# Altium PCB Rackmount_DSP.PcbDoc (part 1 of 24)
Units mil, origin at the board's own origin, x right, y up, seen from the top; angles counter-clockwise.
Board outline 10629.92 x 8267.72 mil, 4 copper layers (Top Layer, Mid Layer 1, Mid Layer 2, Bottom Layer), stack 36.2 mil thick; 4500 components, 1565 nets, 9765 pads, 3289 vias.
Unrouted connection lines stored in the file: 1.
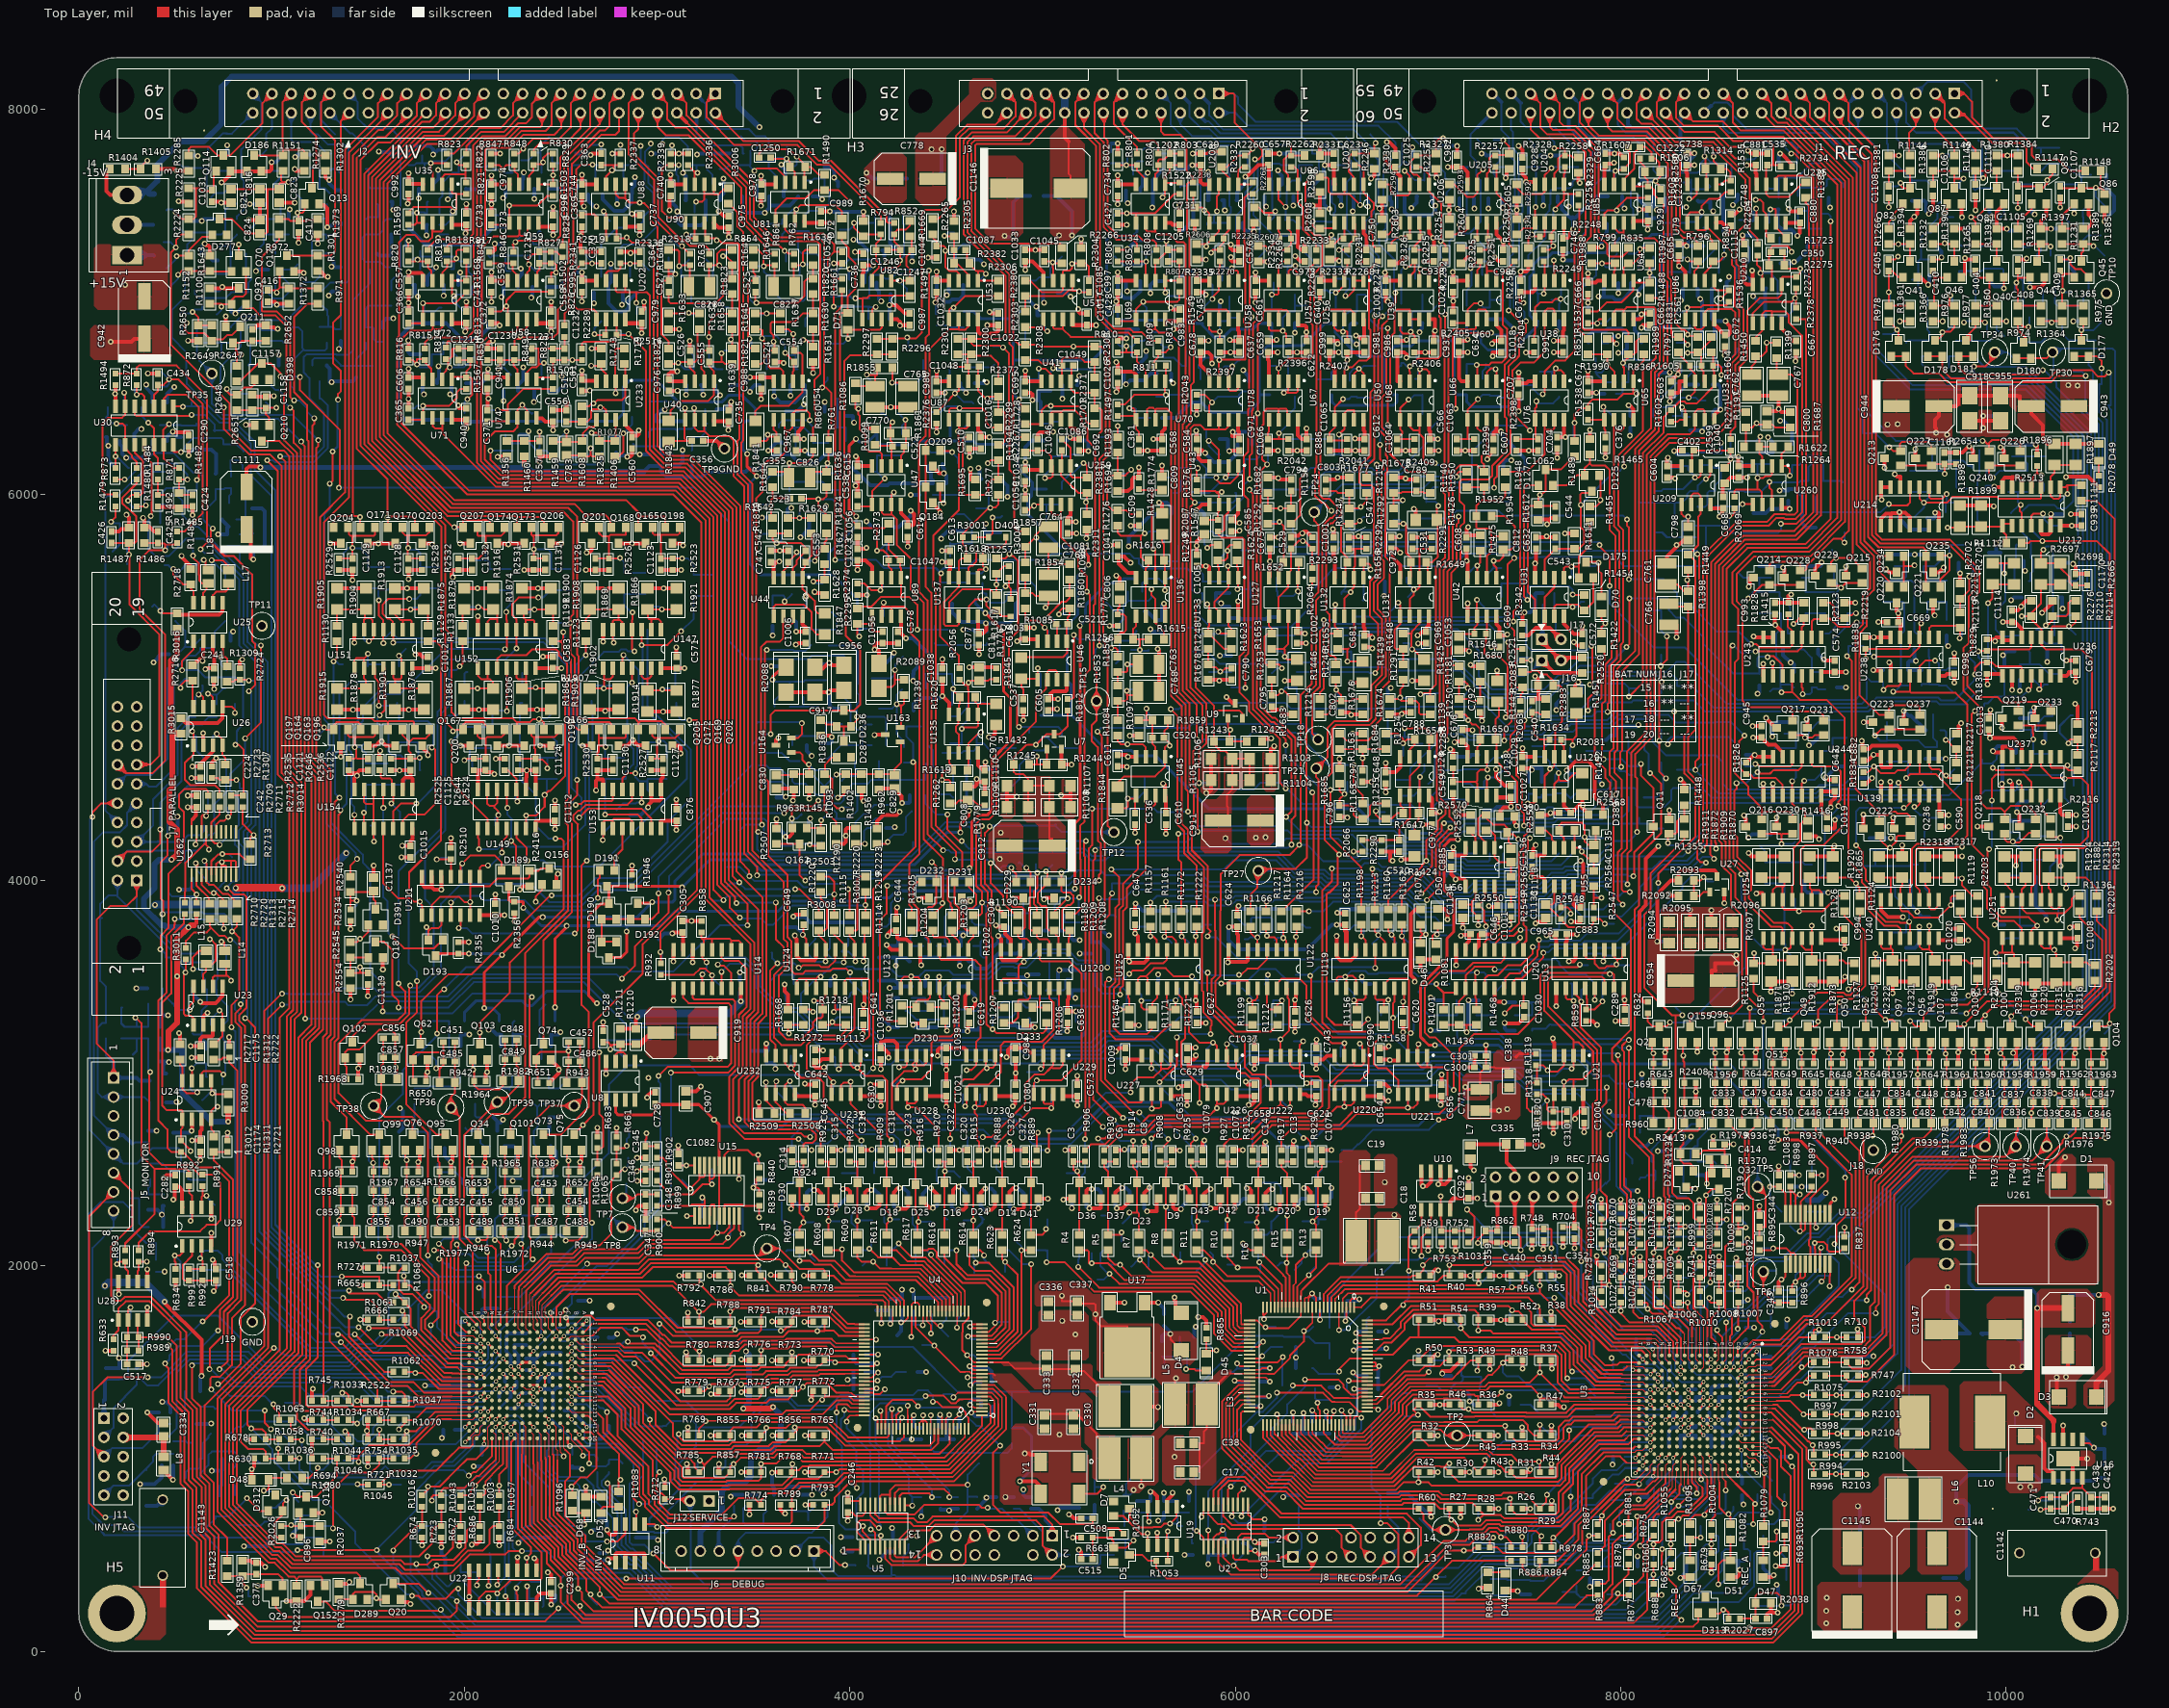
[diagram p0: Top Layer view]
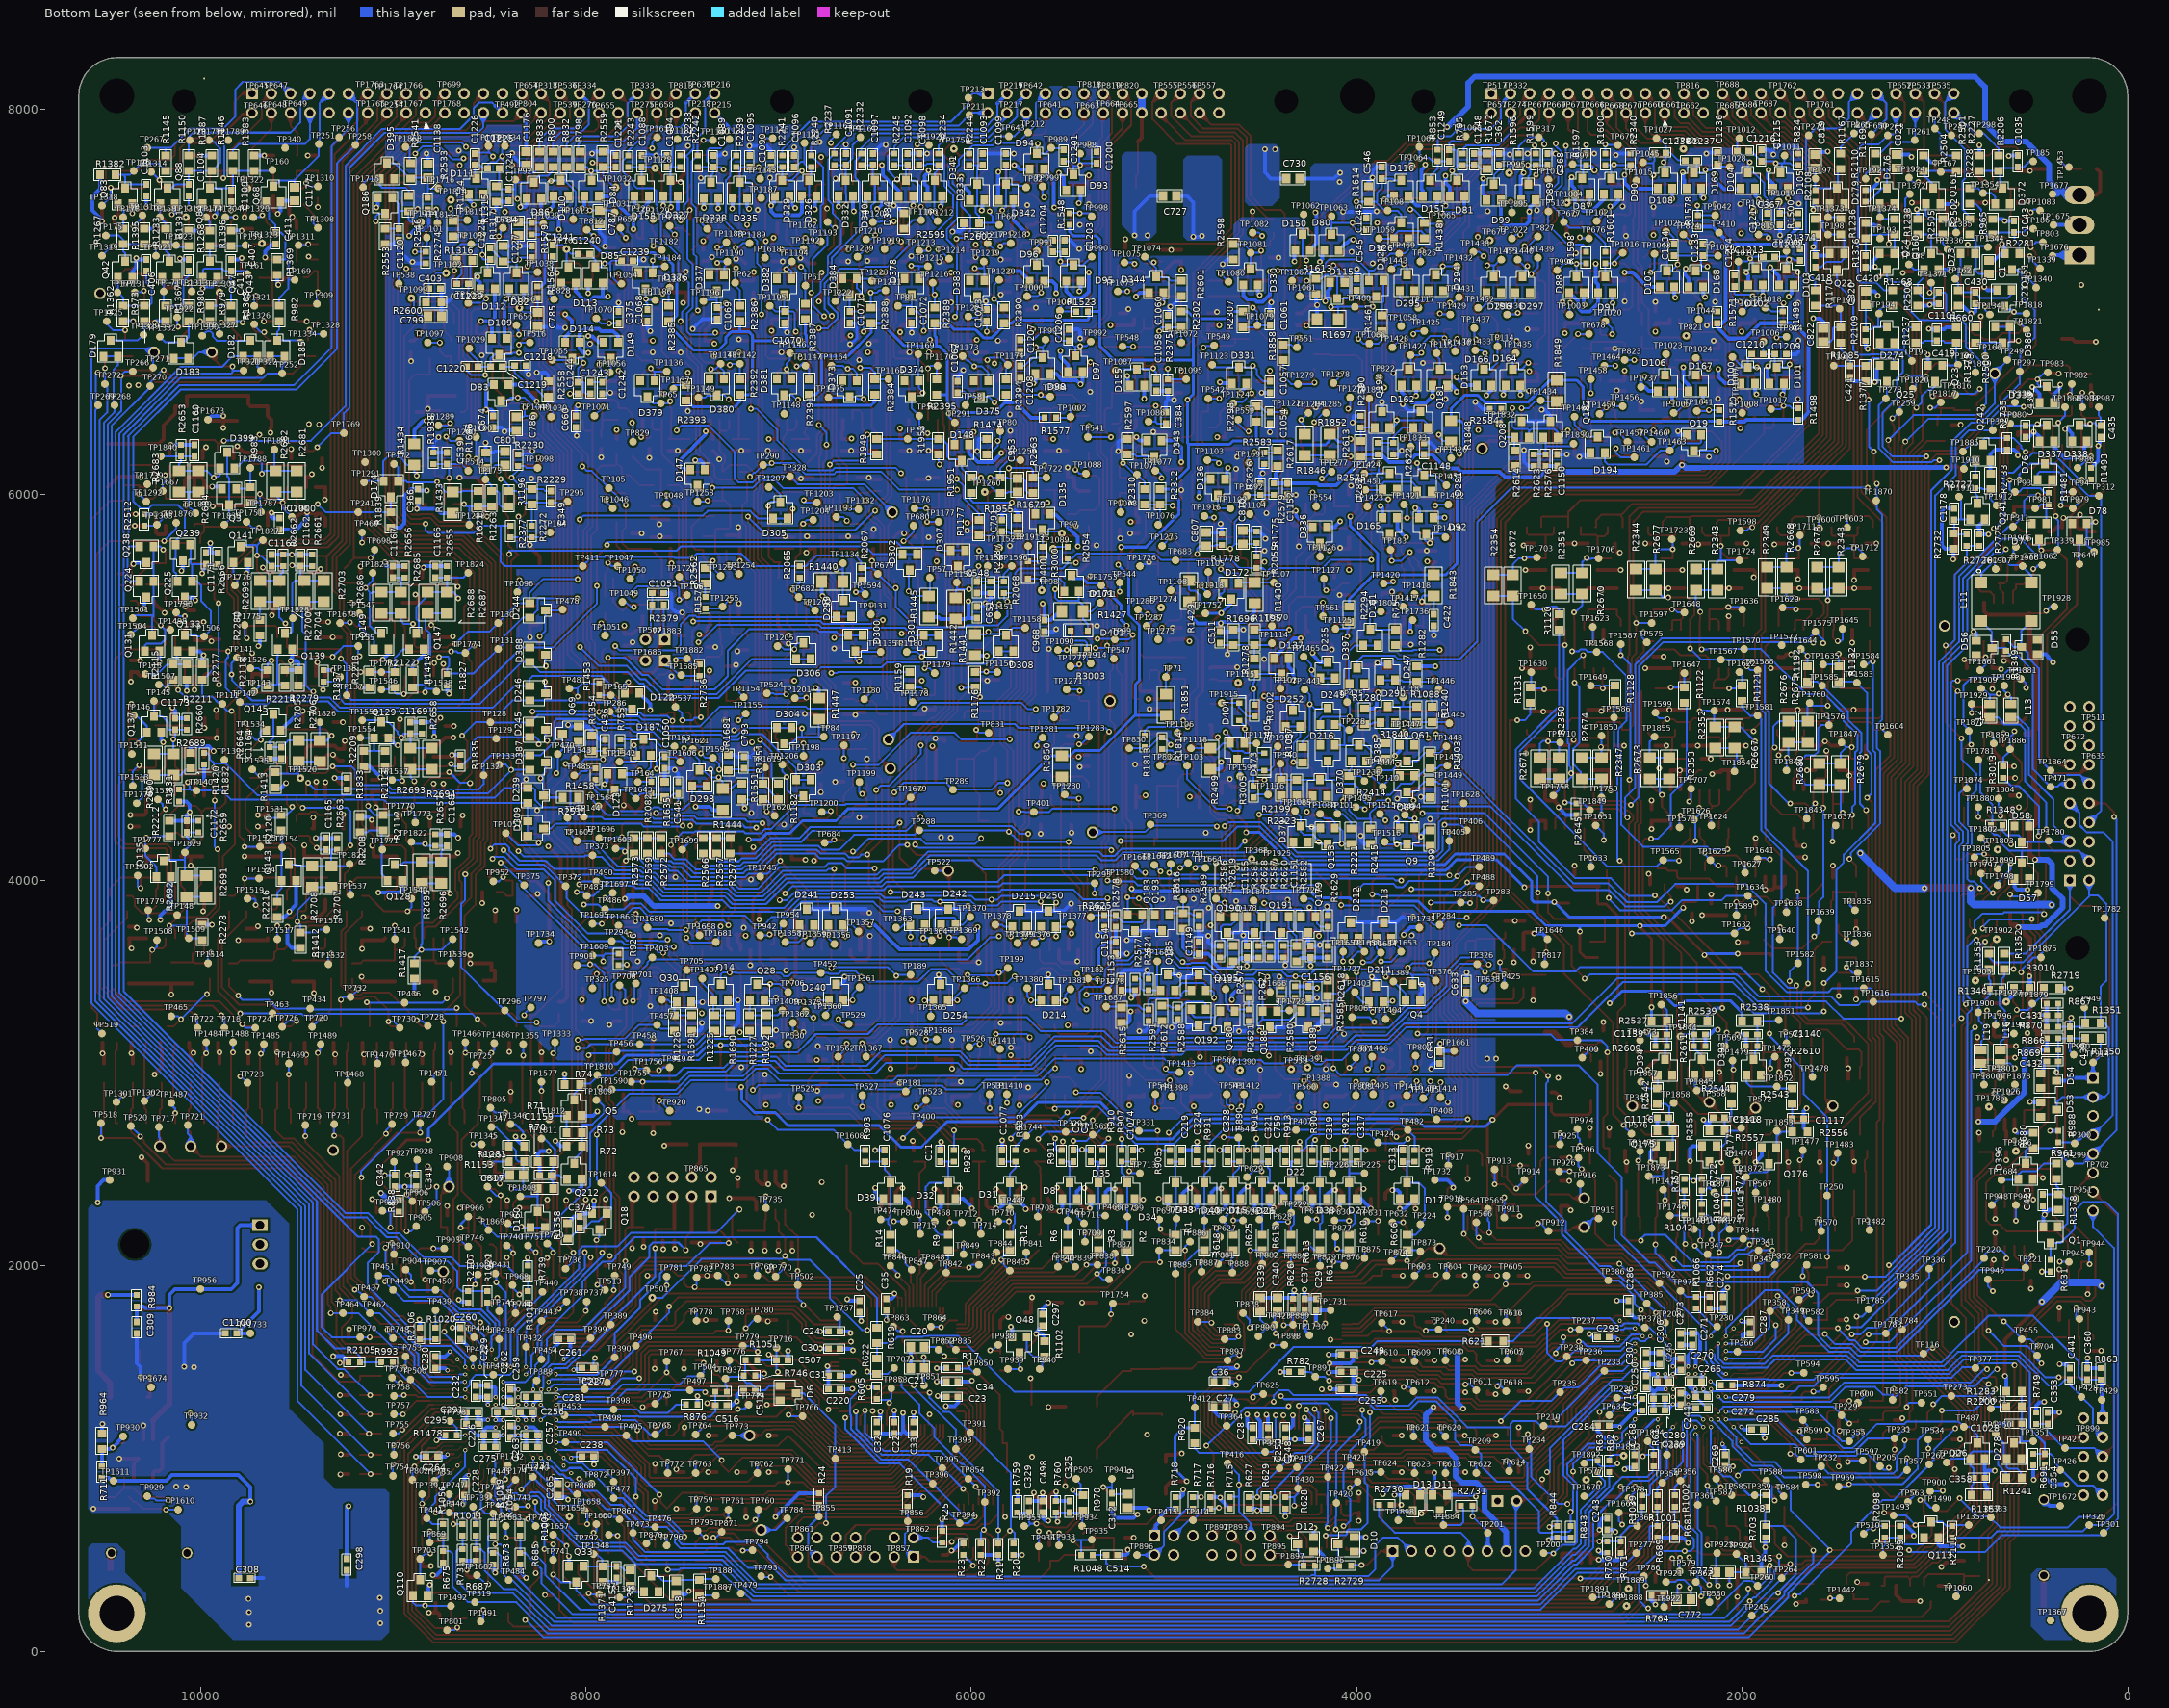
[diagram p1: Bottom Layer view, seen from below]
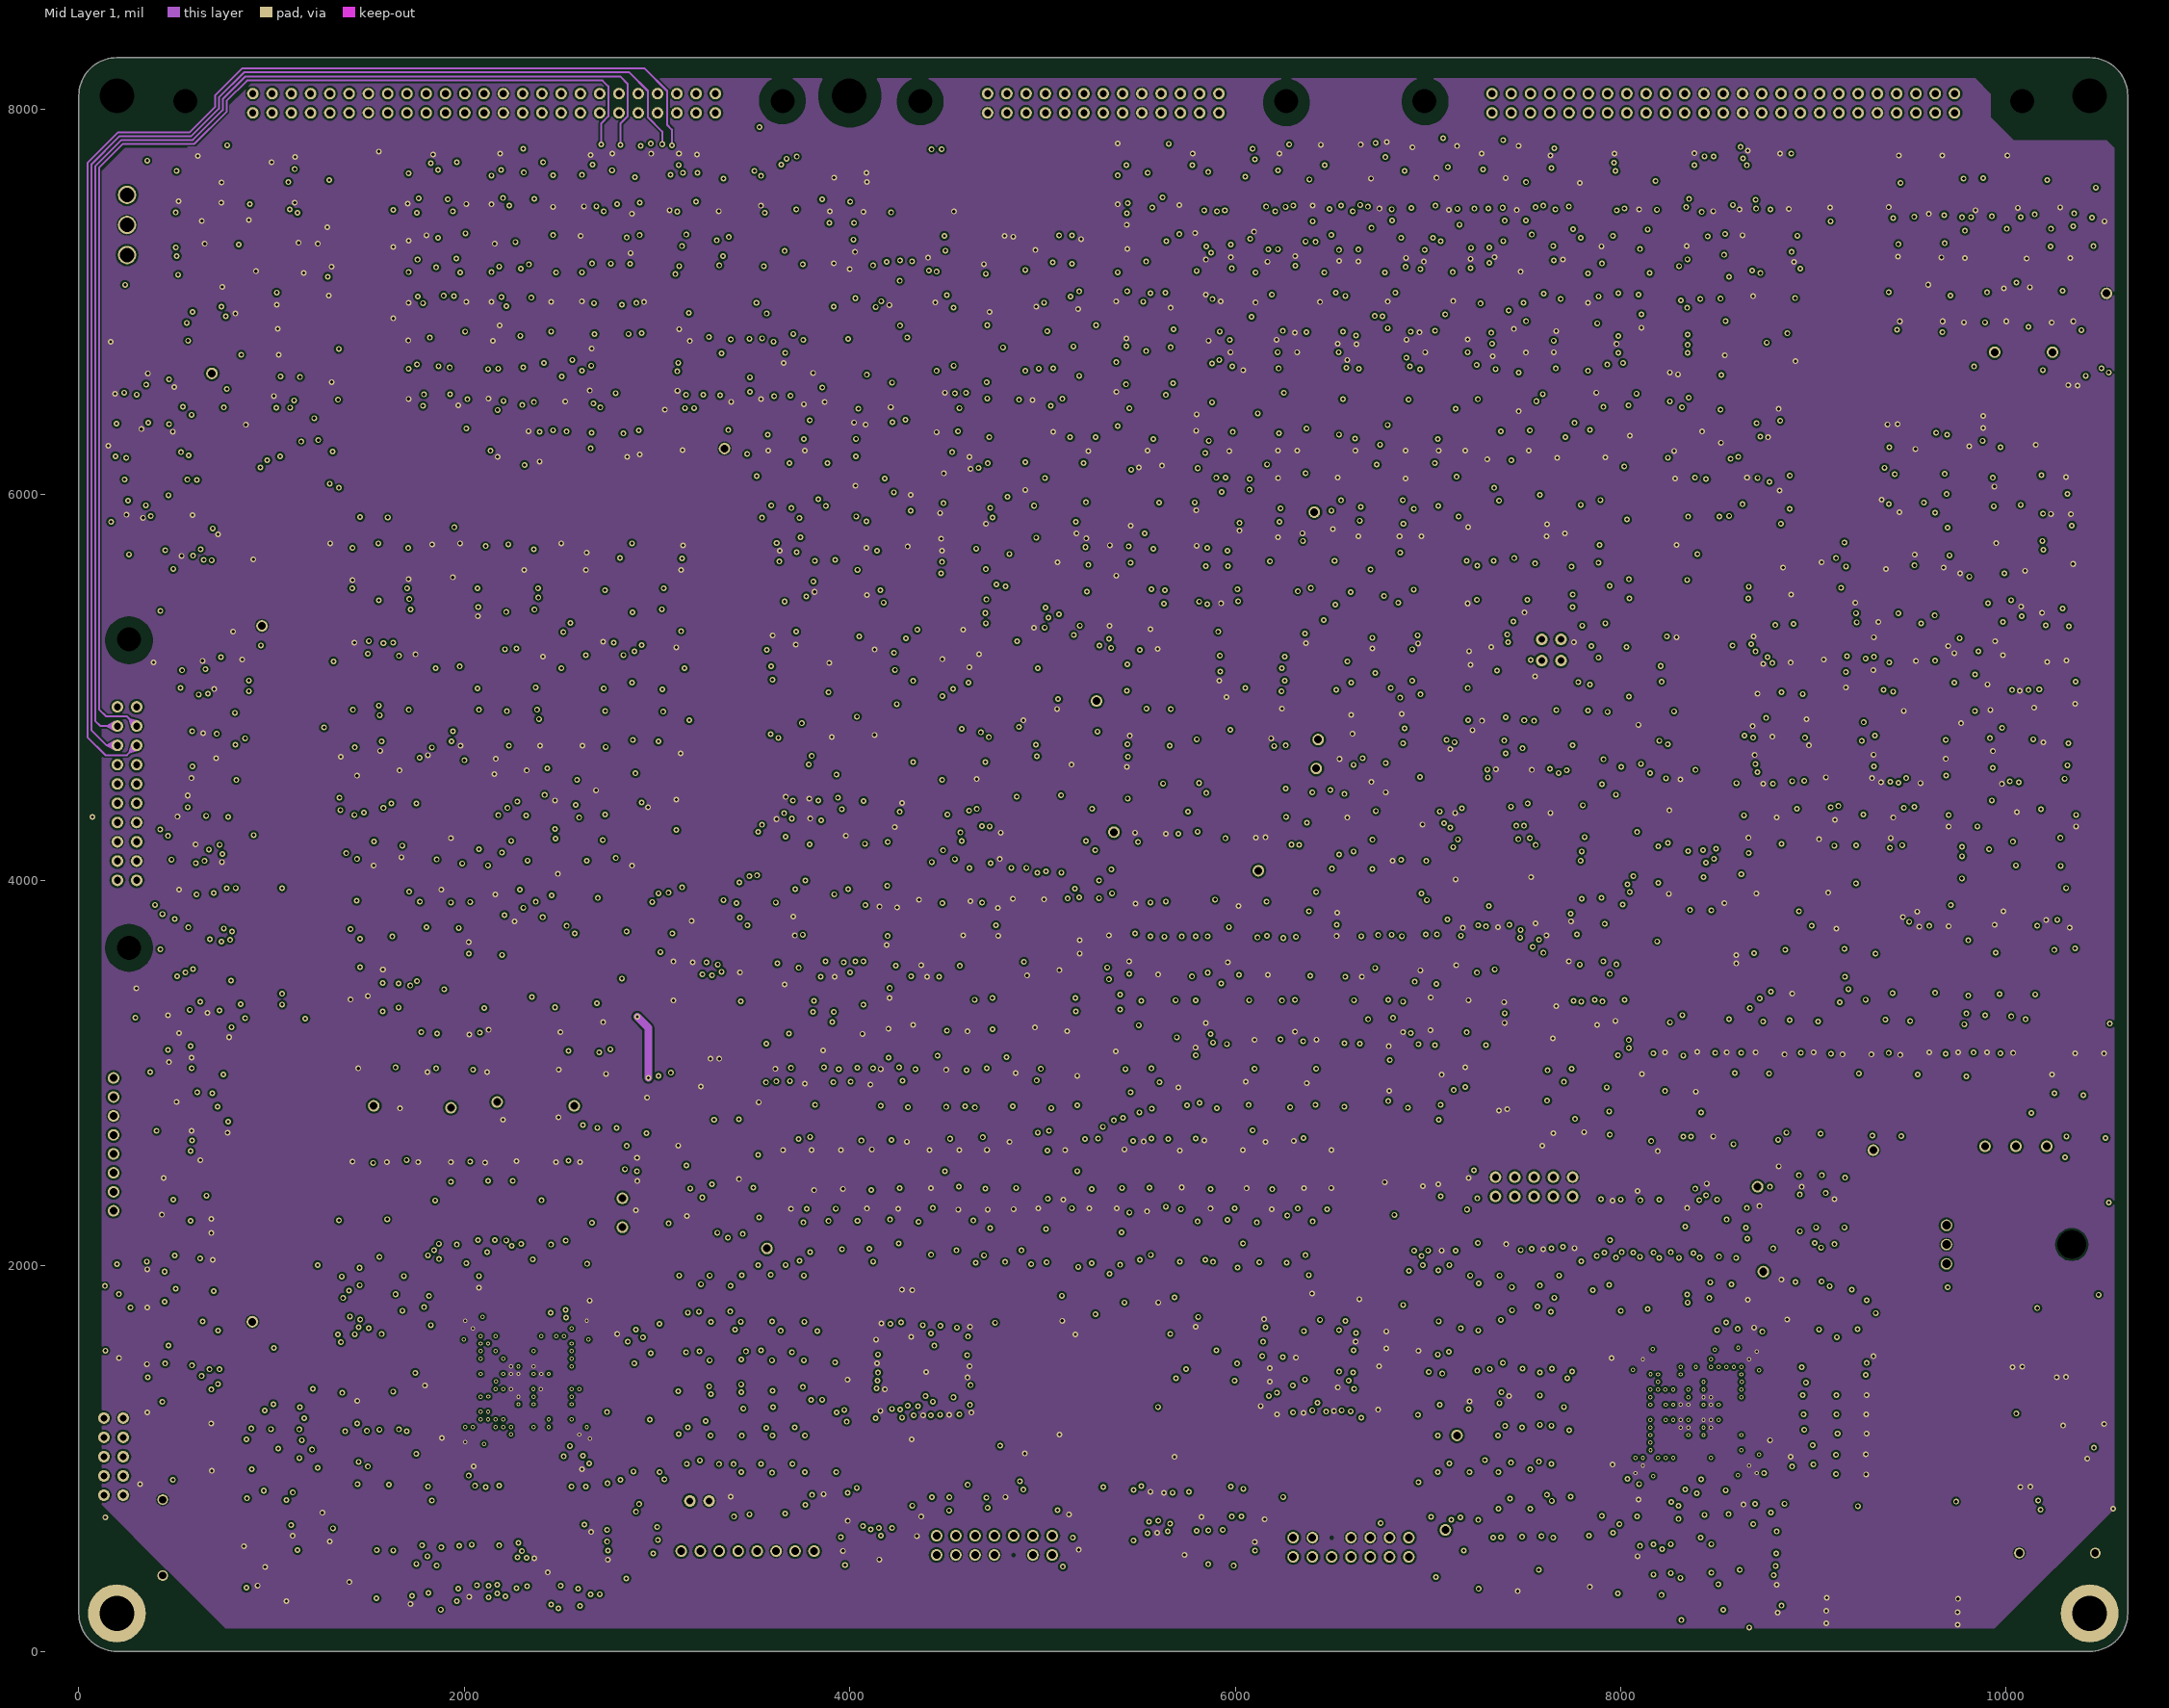
[diagram p2: Mid Layer 1]
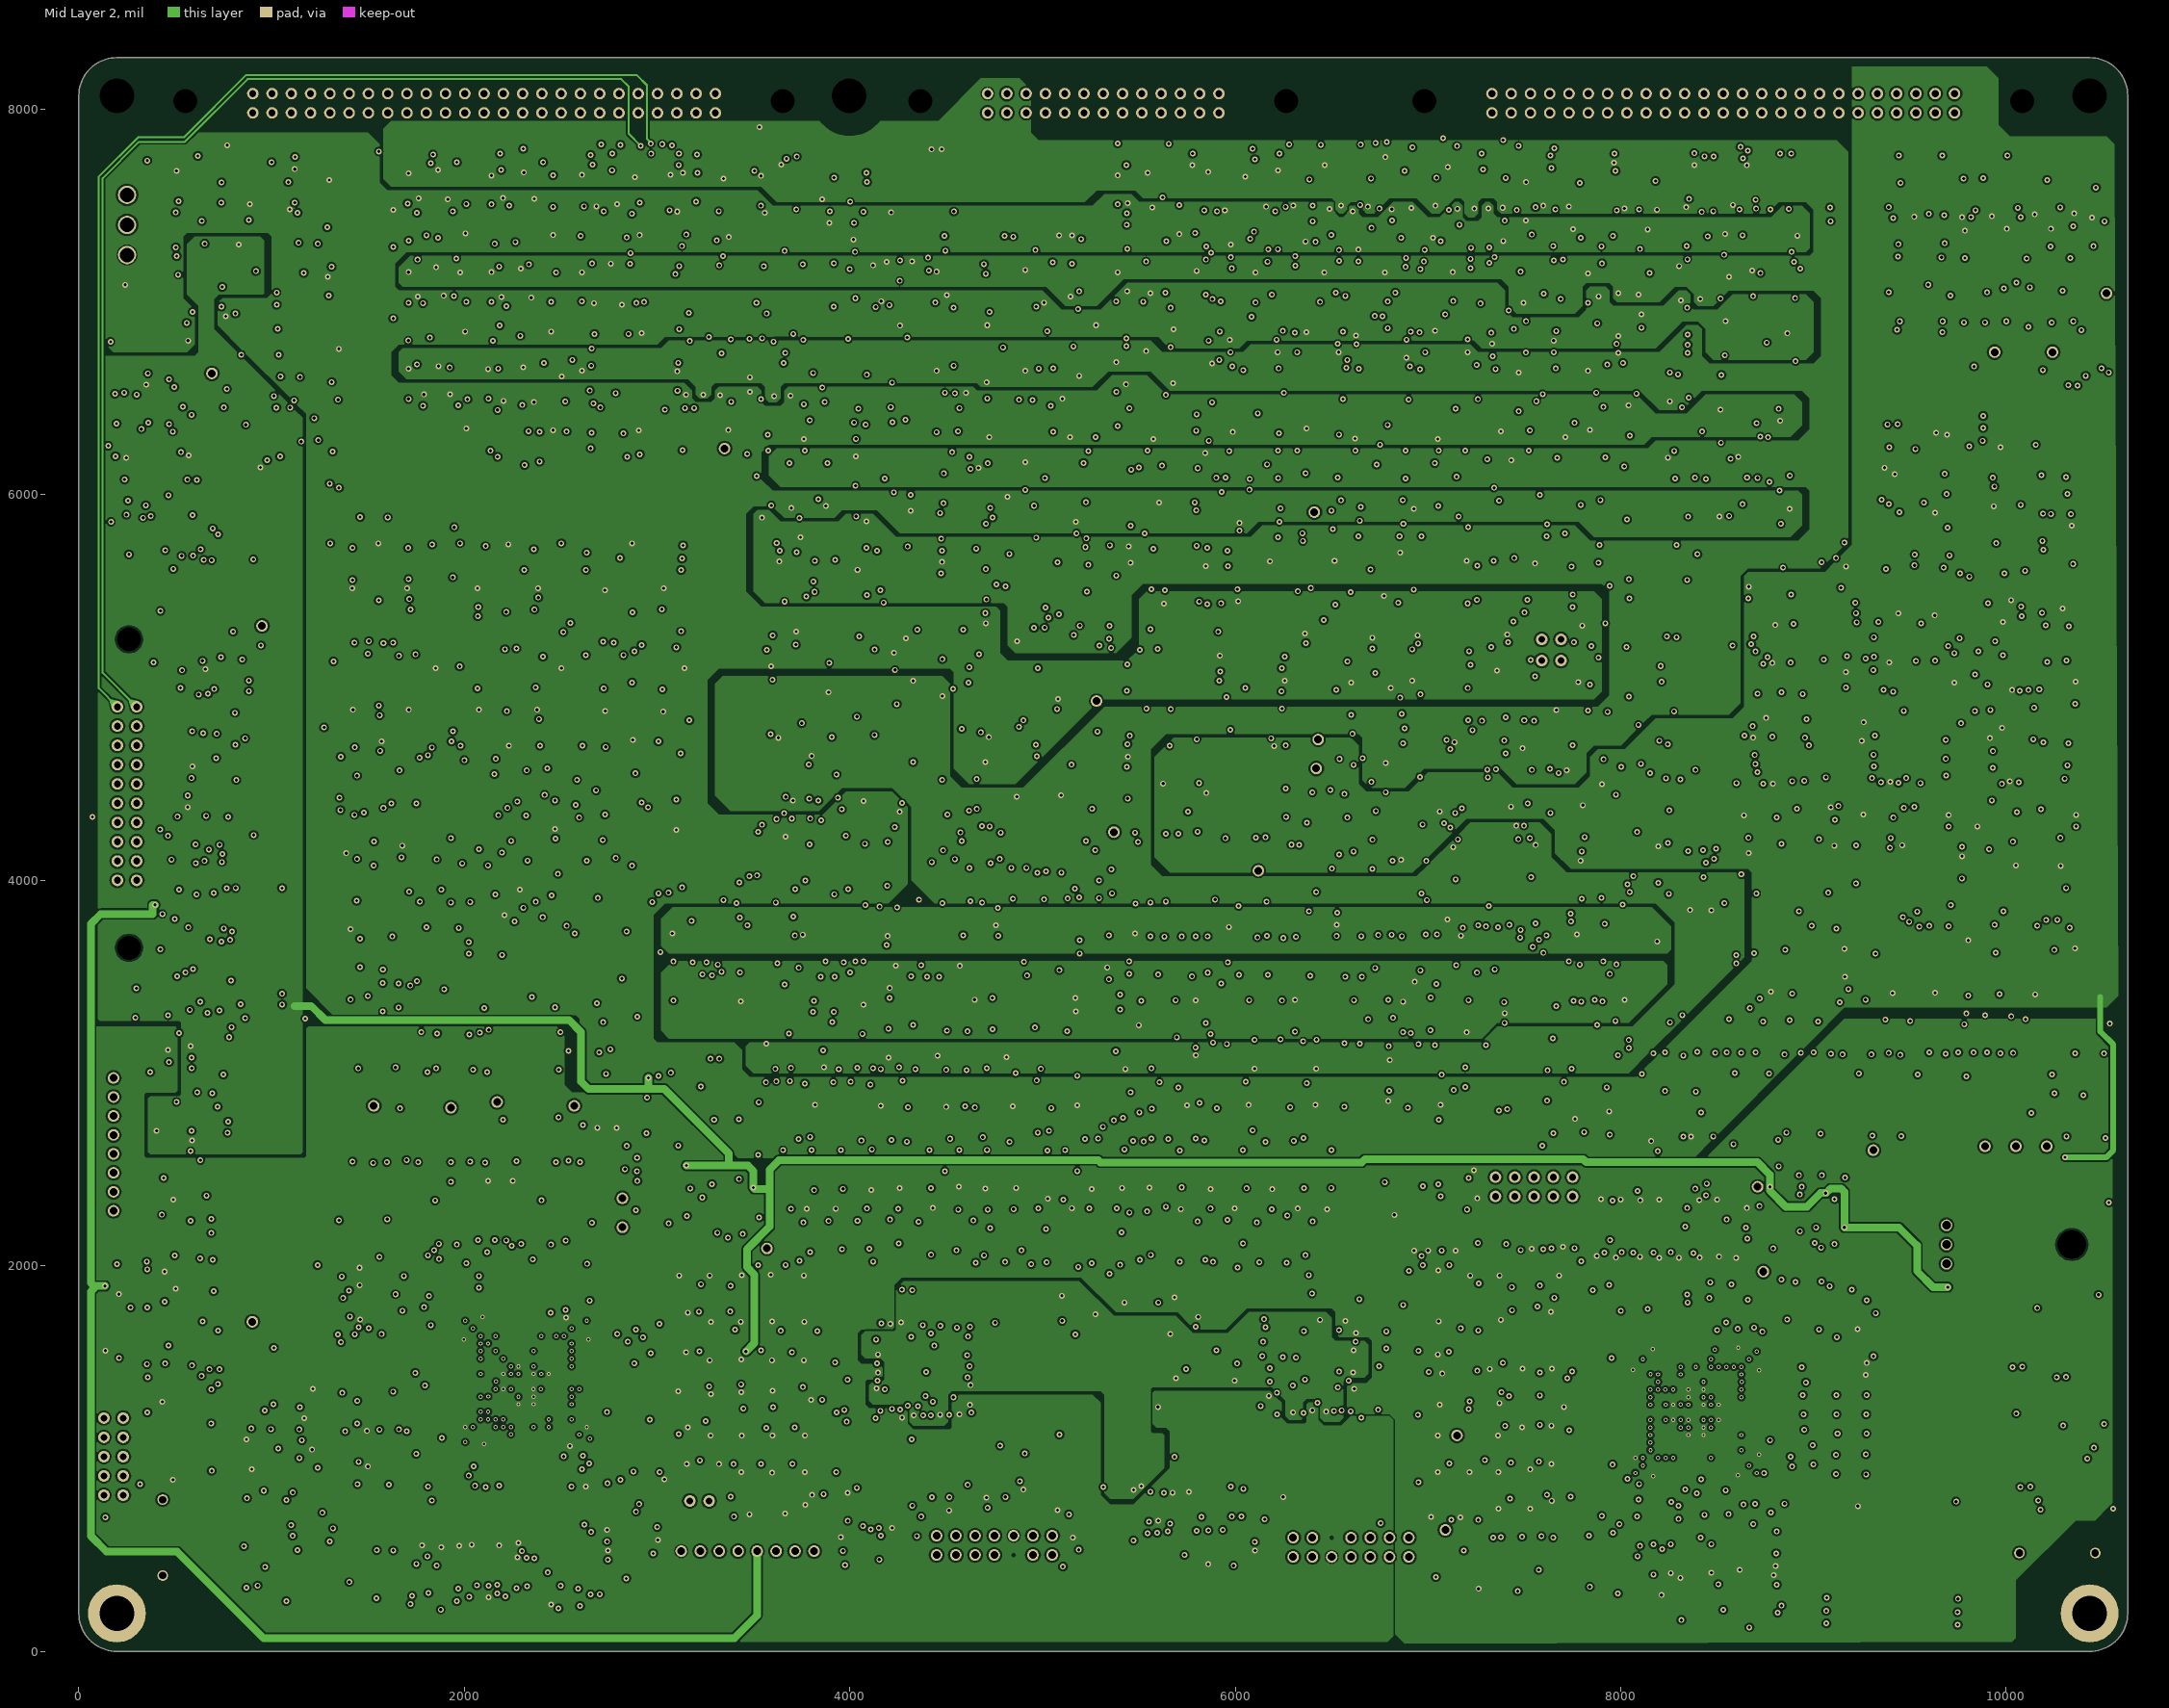
[diagram p3: Mid Layer 2]

## Layer stack, top to bottom
Top Layer: signal copper 0.7
Dielectric: core 20, Core/Pre-preg, Dk 4.7
Mid Layer 1: signal copper 1.4
Dielectric: core 6, Core/Pre-preg, Dk 4.4
Mid Layer 2: signal copper 1.4
Dielectric: core 6, Core/Pre-preg, Dk 4.4
Bottom Layer: signal copper 0.7

## Board outline
0,196.85 0,8070.87 cw(c196.85,8070.87) 196.85,8267.72 10433.07,8267.72 cw(c10433.07,8070.87) 10629.92,8070.87 10629.92,196.85 cw(c10433.07,196.85) 10433.07,0 196.85,0 cw(c196.85,196.85)

## Design rules (kind name [scope] priority, off if disabled: settings)
Clearance [All] p1: gap=10
PolygonConnect [All] p1: connectstyle=Relief reliefconductorwidth=10 reliefentries=4 polygonreliefangle="45 Angle"
RoutingVias [All] p1: holewidth=28 width=50 viastyle="Through Hole" minholewidth=28 minwidth=50 maxholewidth=28 maxwidth=50
SilkscreenOverComponentPads SilkToSolderMaskClearance [IsPad] p1: minsilkscreentomaskgap=10
SolderMaskExpansion [All] p1: expansion=4
TestPointUsage FabricationTestPointUsage [All] p1: valid=0 allowmultiple=FALSE
Testpoint FabricationTestpoint [All] p1: side=3 testpointundercomponent=TRUE minsize=40 maxsize=100 preferedsize=60 minholesize=0 maxholesize=40 preferedholesize=32 testpointgrid=1 style=297 order=0123456789
Width [All] p1: maxlimit=10 minlimit=10 preferedwidth=10
23 further rules are at their usual default settings.

## Classes and differential pairs
net class (Default): 1REC_OC_A+ 1REC_OC_A- 1REC_OC_B+ 1REC_OC_B- 1REC_OC_C+ 1REC_OC_C- 1st_PFC_I+_DISCHG 1st_PFC_I-_DISCHG 2nd_PFC_I+_DISCHG 2nd_PFC_I-_DISCHG 2REC_OC_A+ 2REC_OC_A- 2REC_OC_B+ 2REC_OC_B- 2REC_OC_C+ 2REC_OC_C- +1.8V +1V_REF +2V_REF +3.3V +5V_CTRL +5V_CTRL_CPLD BAT_DISCHARGE_SCR_DRV BAT_EARTH_SHORT BAT_EARTH_SHORT_I BAT_SCR1 BAT_SCR2 BATCOM BP_FB_ACTION BP_FB_ACTION_O BRIDGE_SHORT BUS_OVC BYPASS_V_A BYPASS_V_B BYPASS_V_C CAN_Module_H CAN_Module_L CAN_Monitor_H CAN_Monitor_L CARRIER_SYNC CARRIER_SYNC_F CHARGER_SCR_DRV CHG_OVP CPLD_CARRIER_SYNC CPLD_INV_SYNC CPLD_LBS_SYNC CPLD_SER_BUS_R CPLD_SER_BUS_T CPLD_SER_BUS_T_5V D1_A D1_B D1_C D2_A D2_B D2_C D3_A D3_B D3_C D4_A D4_B D4_C DCBAT+ DCBAT- DCBUS+ DCBUS+OVP DCBUS- DCBUS-OVP DISPLAY DSP_CHG_PWM+ DSP_CHG_PWM+z DSP_CHG_PWM- DSP_CHG_PWM-z DSP_IR1+ DSP_IR1- DSP_IR2+ DSP_IR2+/VBUS_P DSP_IR2- DSP_IR2-/VBUS_N DSP_IS1+ DSP_IS1- DSP_IS2+ DSP_IS2+/DSP_VCHG+ DSP_IS2- DSP_IS2-/DSP_VCHG- DSP_IT1+ DSP_IT1+/IBAT+_CHG DSP_IT1- DSP_IT1-/IBAT-_CHG DSP_IT2+ DSP_IT2+/VBAT+ DSP_IT2- DSP_IT2-/VBAT- DSP_VCHG+ DSP_VCHG- DSP_VOUT_A DSP_VOUT_B DSP_VOUT_C EPO EPO+ EPO- FAN_DSP_PWM FAN_FAULT FAN_FAULT_IN FAN_PWM FUSE_FAULT FUSE_FAULT_I HW_RESET I+_CHG I+_CHGF I+chg_P I-_CHG I-_CHGF I-chg_P IBAT+_CHG IBAT-_CHG IBUS_P IINV_A IINV_A/VINV_DC_A IINV_B IINV_B/VINV_DC_B IINV_C IINV_C/VINV_DC_C IINV_L_AF IINV_L_BF IINV_L_CF IINV_LU IINV_LV IINV_LW IINV_U IINV_V IINV_W IINVL_U_FOR_CMP IINVL_V_FOR_CMP IINVL_W_FOR_CMP IL_A IL_A/IL_AF IL_B IL_B/IL_BF IL_C IL_C/IL_CF INV_485_RXD INV_485_TXD INV_AD_ADJ1 INV_AD_ADJ2 INV_AD_CS INV_BOOT_EN INV_BOOT_EN_I INV_CAN1_RXD INV_CAN1_TXD INV_CAN1_TXD_5V INV_CAN2_RXD INV_CAN2_TXD INV_CAN2_TXD_5V INV_CPLD_CLK INV_CPLD_RESET INV_CS INV_DA_CLK INV_DA_CS INV_DA_Data INV_DS_A INV_DS_B INV_DSP_CLK INV_DSP_GB1_U INV_DSP_GB1_Uz INV_DSP_GB1_V INV_DSP_GB1_Vz INV_DSP_GB1_W INV_DSP_GB1_Wz INV_DSP_GB2_U INV_DSP_GB2_Uz INV_DSP_GB2_V INV_DSP_GB2_Vz INV_DSP_GB2_W INV_DSP_GB2_Wz INV_DSP_GH1_U INV_DSP_GH1_Uz INV_DSP_GH1_V INV_DSP_GH1_Vz INV_DSP_GH1_W INV_DSP_GH1_Wz INV_DSP_GH2_U INV_DSP_GH2_Uz INV_DSP_GH2_V INV_DSP_GH2_Vz INV_DSP_GH2_W INV_DSP_GH2_Wz INV_DSP_RESET INV_EEPROM_CTR INV_ET0_IN INV_ET0_OUT INV_ET1_IN INV_ET1_OUT INV_EXT_IO_0 INV_EXT_IO_1 INV_EXT_IO_2 INV_EXT_IO_3 INV_EXT_IO_4 INV_EXT_IO_5 INV_EXT_IO_6 INV_EXT_IO_7 INV_EXT_IO_8 INV_EXT_IO_9 INV_EXT_IO_10 INV_EXT_IO_11 INV_EXT_IO_12 INV_EXT_IO_13 INV_EXT_IO_14 INV_EXT_IO_15 INV_EXT_IO_16 INV_EXT_IO_17 INV_EXT_IO_18 INV_EXT_IO_19 INV_EXT_IO_20 INV_EXT_IO_21 INV_EXT_IO_22 INV_EXT_IO_23 INV_EXT_IO_24 INV_EXT_IO_25 INV_EXT_IO_26 INV_EXT_IO_27 INV_EXT_IO_28 INV_EXT_IO_29 INV_EXT_IO_30 INV_EXT_IO_31 INV_GPIO_0 INV_GPIO_1 INV_GPIO_2 INV_GPIO_3 INV_GPIO_4 INV_GPIO_5 INV_GPIO_6 INV_GPIO_7 INV_GPIO_8 INV_GPIO_9 INV_GPIO_10 INV_GPIO_11 INV_GPIO_12 INV_GPIO_13 INV_GPIO_14 INV_GPIO_15 INV_GPIO_16 INV_GPIO_17 INV_GPIO_18 INV_GPIO_19 INV_GPIO_20 INV_GPIO_21 INV_GPIO_22 INV_GPIO_23 INV_GPIO_24 INV_GPIO_25 INV_GPIO_26 INV_GPIO_27 INV_GPIO_28 INV_GPIO_29 INV_GPIO_30 INV_GPIO_31 INV_GPIO_32 INV_GPIO_33 INV_GPIO_34 INV_IINV_A/VINV_DC_A INV_IINV_B/VINV_DC_B INV_IINV_C/VINV_DC_C INV_IL_A/IL_AF INV_IL_B/IL_BF INV_IL_C/IL_CF INV_IL_OCP_A INV_IL_OCP_B INV_IL_OCP_C INV_INDICTOR INV_OUT_I_A INV_OUT_I_B INV_OUT_I_C INV_SCI_RXD INV_SCI_TXD INV_SET INV_SHUT INV_shutdown INV_SYNC INV_SYNC_F INV_VBP_A/VOUT_A INV_VBP_B/VOUT_B INV_VBP_C/VOUT_C INV_VBUS_P/VBUS_N INV_VINV_A INV_VINV_B INV_VINV_C INV_VINV_C/ADREF IR1+ IR1- IR2+ IR2- IS1+ IS1- IS2+ IS2- IT1+ IT1- IT2+ IT2- LBS_SYNC LBS_SYNC_F MAIN_SCR_U_DOWN MAIN_SCR_U_DOWN_DRV MAIN_SCR_U_UP MAIN_SCR_U_UP_DRV MAIN_SCR_V_DOWN MAIN_SCR_V_DOWN_DRV MAIN_SCR_V_UP MAIN_SCR_V_UP_DRV MAIN_SCR_W_DOWN MAIN_SCR_W_DOWN_DRV MAIN_SCR_W_UP MAIN_SCR_W_UP_DRV Mod_OTP Mod_OverTemp Mod_Temp MODULE_ALARM_LED MODULE_ID_B0 MODULE_ID_B0_I MODULE_ID_B1 MODULE_ID_B1_I MODULE_ID_B2 MODULE_ID_B2_I MODULE_ID_B3 MODULE_ID_B3_I MODULE_LED1 MODULE_LED2 MODULE_OK_LED MODULE_READY MODULE_READY_I MODULE_TYPE MODULE_TYPE_I N_DCBAT+ N_DCBAT- N_DCBUS+ N_DCBUS+OVP N_DCBUS- N_DCBUS-OVP N_VCHG+ N_VCHG- N_Vin_R N_Vin_S N_Vin_T N_VINVA N_VINVB N_VINVC N_VOut_A N_VOut_A_DC N_VOut_B N_VOut_B_DC N_VOut_C N_VOut_C_DC OTHERS_BAT_START_EN OTHERS_BAT_START_EN_O OUT_CROSS_ZERO_HW OUT_I_A OUT_I_A_I OUT_I_B OUT_I_B_I OUT_I_C OUT_I_C_I OUT_RELAY_DRV OUT_RELAY_DRV_O PGND POWER_FAULT POWER_FAULT_I POWER_OK PROTEC_REFA1 PROTEC_REFA2 PROTEC_REFB1 PROTEC_REFB2 PROTEC_REFC1 PROTEC_REFC2 PROTECT_chg PWM_1REC_GB1S PWM_1REC_GB2S PWM_1REC_GB3S PWM_1REC_GH1S PWM_1REC_GH2S PWM_1REC_GH3S PWM_2REC_GB1S PWM_2REC_GB2S PWM_2REC_GB3S PWM_2REC_GH1S PWM_2REC_GH2S PWM_2REC_GH3S PWM_INV_G1_A PWM_INV_G1_B PWM_INV_G1_C PWM_INV_G2_A PWM_INV_G2_B PWM_INV_G2_C PWM_INV_G3_A PWM_INV_G3_B PWM_INV_G3_C PWM_INV_G4_A PWM_INV_G4_B PWM_INV_G4_C REC_485_RXD REC_485_TXD REC_AD_ADJ1 REC_AD_ADJ2 REC_AD_CS1 REC_AD_CS2 REC_AD_CS3 REC_BOOT_EN REC_BOOT_EN_I REC_CAN_RXD REC_CAN_TXD REC_CAN_TXD_5V REC_CPLD_CLK REC_CPLD_RESET REC_CS1 REC_CS2 REC_CS3 REC_DA_CLK REC_DA_CS REC_DA_Data REC_DISPLAY REC_DS_A REC_DS_B REC_DSP_1_GB1 REC_DSP_1_GB1z REC_DSP_1_GB2 REC_DSP_1_GB2z REC_DSP_1_GB3 REC_DSP_1_GB3z REC_DSP_1_GH1 REC_DSP_1_GH1z REC_DSP_1_GH2 REC_DSP_1_GH2z REC_DSP_1_GH3 REC_DSP_1_GH3z REC_DSP_2_GB1 REC_DSP_2_GB1z REC_DSP_2_GB2 REC_DSP_2_GB2z REC_DSP_2_GB3 REC_DSP_2_GB3z REC_DSP_2_GH1 REC_DSP_2_GH1z REC_DSP_2_GH2 REC_DSP_2_GH2z REC_DSP_2_GH3 REC_DSP_2_GH3z REC_DSP_CLK REC_DSP_IR1+ REC_DSP_IR1- REC_DSP_IR2+/VBUS_P REC_DSP_IR2-/VBUS_N REC_DSP_IS1+ REC_DSP_IS1- REC_DSP_IS2+/DSP_VCHG+ REC_DSP_IS2-/DSP_VCHG- REC_DSP_IT1+/IBAT+_CHG REC_DSP_IT1-/IBAT-_CHG REC_DSP_IT2+/VBAT+ REC_DSP_IT2-/VBAT- REC_DSP_RESET REC_EEPROM_CTR REC_EXT_IO_0 REC_EXT_IO_1 REC_EXT_IO_2 REC_EXT_IO_3 REC_EXT_IO_4 REC_EXT_IO_5 REC_EXT_IO_6 REC_EXT_IO_7 REC_EXT_IO_8 REC_EXT_IO_9 REC_EXT_IO_10 REC_EXT_IO_11 REC_EXT_IO_12 REC_EXT_IO_13 REC_EXT_IO_14 REC_EXT_IO_15 REC_EXT_IO_16 REC_EXT_IO_17 REC_EXT_IO_18 REC_EXT_IO_19 REC_EXT_IO_20 REC_EXT_IO_21 REC_EXT_IO_22 REC_EXT_IO_23 REC_EXT_IO_24 REC_EXT_IO_25 REC_EXT_IO_26 REC_EXT_IO_27 REC_EXT_IO_28 REC_EXT_IO_29 REC_EXT_IO_30 REC_EXT_IO_31 REC_EXT_IO_32 REC_EXT_IO_33 REC_EXT_IO_34 REC_EXT_IO_35 REC_EXT_IO_36 REC_EXT_IO_37 REC_GPIO_0 REC_GPIO_1 REC_GPIO_2 REC_GPIO_3 REC_GPIO_4 REC_GPIO_5 REC_GPIO_6 REC_GPIO_7 REC_GPIO_8 REC_GPIO_9 REC_GPIO_10 REC_GPIO_11 REC_GPIO_12 REC_GPIO_13 REC_GPIO_14 REC_GPIO_15 REC_GPIO_16 REC_GPIO_17 REC_GPIO_18 REC_GPIO_19 REC_GPIO_20 REC_GPIO_21 REC_GPIO_22 REC_GPIO_23 REC_GPIO_24 REC_GPIO_25 REC_GPIO_26 REC_GPIO_27 REC_GPIO_28 REC_GPIO_29 REC_GPIO_30 REC_GPIO_31 REC_GPIO_32 REC_GPIO_33 REC_GPIO_34 REC_INDICTOR REC_INV_IO_0 REC_INV_IO_1 REC_INV_IO_2 REC_INV_IO_3 REC_INV_IO_4 REC_INV_IO_5 REC_INV_IO_6 REC_INV_IO_7 REC_INV_IO_8 REC_INV_IO_9 REC_INV_IO_10 REC_INV_IO_11 REC_INV_IO_12 REC_INV_IO_13 REC_INV_IO_14 REC_OC REC_RESET REC_SCI_RXD REC_SCI_TXD REC_SET REC_shutdown REC_SHUTDOWN_CPLD REC_VIN_A/ADREF REC_VIN_B REC_VIN_C RESET_FROM_REC SER_BUS_H SER_BUS_L SERVICE_MODE SOFT_START_RELAY SOFT_START_RELAY_CPLD_IN SOFT_START_RELAY_CPLD_OUT SYS_RESET T_MOD V+CHG_PWM V-CHG_PWM VBAT+ VBAT- VBP_A VBP_A/VOUT_A VBP_B VBP_B/VOUT_B VBP_C VBP_C/VOUT_C VBP_FEEDBACK VBP_FEEDBACK_IN VBUS_N VBUS_N_FOR_SS_CMP VBUS_OVP VBUS_P VBUS_P/VBUS_N VBUS_P_FOR_SS_CMP VBUS_REF VBUS_ST_REF VCHG+ VCHG- VIN_A VIN_A/ADREF VIN_B VIN_C Vin_R Vin_S Vin_T VINV_A VINV_B VINV_C VINV_DC_A VINV_DC_B VINV_DC_C VINVA VINVB VINVC VOut_A VOut_A_DC VOUT_A_FOR_CROSS VOut_B VOut_B_DC VOut_C VOut_C_DC VOV_BAT+ VOV_BAT- VREF3V VREF+ VREF- XSIG020411 XSIG020421 XSIG020506 XSIG020896 XSIG021084 XSIG021089 XSIG021092 XSIG021093 XSIG030714 XSIG030715 XSIG030716 XSIG030717 XSIG030718 XSIG030719 XSIG030720 XSIG030721 XSIG030722 XSIG030723 XSIG030724 XSIG030725 XSIG030726 XSIG030727 XSIG030728 XSIG030729 XSIG030815 XSIG030816 XSIG030817 XSIG030821 XSIG030825 XSIG030826 XSIG030827 XSIG030828 XSIG030829 XSIG030830 XSIG030831 XSIG030833 XSIG030835 XSIG030842 XSIG030843 XSIG030844 XSIG030845 XSIG030846 XSIG030850 XSIG030853 XSIG030857 XSIG040037 XSIG040039 XSIG040042 XSIG040044 XSIG040070 XSIG040178 XSIG040179 XSIG040180 XSIG040181 XSIG040182 XSIG040183 XSIG040184 XSIG040185 XSIG040233 XSIG040238 XSIG040265 XSIG040266 XSIG040267 XSIG040268 XSIG040270 XSIG040272 XSIG040274 XSIG050823 XSIG050824 XSIG050825 XSIG050826 XSIG050827 XSIG050828 XSIG050829 XSIG050830 XSIG050831 XSIG050832 XSIG050833 XSIG050834 XSIG050835 XSIG050836 XSIG050837 XSIG050838 XSIG050924 XSIG050925 XSIG050926 XSIG050930 XSIG050934 XSIG050935 XSIG050936 XSIG050937 XSIG050938 XSIG050939 XSIG050940 XSIG050942 XSIG050944 XSIG050951 XSIG050952 XSIG050953 XSIG050954 XSIG050955 XSIG050959 XSIG050961 XSIG050964 XSIG060040 XSIG060042 XSIG060043 XSIG060051 XSIG060053 XSIG060060 XSIG060242 XSIG070200 XSIG070205 XSIG070217 XSIG070221 XSIG070246 XSIG070248 XSIG070250 XSIG070252 XSIG070255 XSIG070256 XSIG070260 XSIG070261 XSIG070270 XSIG070272 XSIG070274 XSIG070276 XSIG070279 XSIG070280 XSIG070284 XSIG070285 XSIG070301 XSIG070302 XSIG070314 XSIG070315 XSIG070317 XSIG070318 XSIG070327 XSIG070330 XSIG070340 XSIG070341 XSIG070363 XSIG070364 XSIG070365 XSIG070366 XSIG081871 XSIG081875 XSIG081877 XSIG081889 XSIG081898 XSIG081921 XSIG081929 XSIG081930 XSIG081935 XSIG081939 XSIG081942 XSIG081946 XSIG082003 XSIG082004 XSIG082006 XSIG082011 XSIG082016 XSIG082104 XSIG082118 XSIG082125 XSIG082126 XSIG082133 XSIG082140 XSIG082141 XSIG082152 XSIG082161 XSIG082179 XSIG082192 XSIG082201 XSIG082216 XSIG082219 XSIG082226 XSIG082228 XSIG090590 XSIG090624 XSIG090625 XSIG090637 XSIG090638 XSIG090639 XSIG090647 XSIG090648 XSIG090652 XSIG090659 XSIG090673 XSIG090685 XSIG090687 XSIG090692 XSIG090710 XSIG090711 XSIG090714 XSIG090715 XSIG090716 XSIG090719 XSIG090722 XSIG100686 XSIG100765 XSIG100766 XSIG100863 XSIG100864 XSIG100865 XSIG110033 XSIG110034 XSIG110039 XSIG110040 XSIG110046 XSIG110047 XSIG110053 XSIG110054 XSIG110060 XSIG110061 XSIG110067 XSIG110068 XSIG110115 XSIG110133 XSIG110161 XSIG110170 XSIG110177 XSIG110178 XSIG110179 XSIG110180 XSIG110190 XSIG110191 XSIG110212 XSIG110213 XSIG110220 XSIG110243 XSIG110245 XSIG120017 XSIG120033 XSIG120036 XSIG120053 XSIG120058 XSIG120071 XSIG120098 XSIG120108 XSIG120125 XSIG120126 XSIG120131 XSIG120132 XSIG120134 XSIG120146 XSIG120159 XSIG130009 XSIG130010 XSIG130014 XSIG130027 XSIG130029 XSIG130033 XSIG130045 XSIG130047 XSIG130051 XSIG130065 XSIG130075 XSIG130086 XSIG130097 XSIG130101 XSIG130105 XSIG130123 XSIG130126 XSIG130129 XSIG140020 XSIG140036 XSIG140038 XSIG140054 XSIG140056 XSIG140077 XSIG140084 XSIG140120 XSIG140124 XSIG140125 XSIG140135 XSIG140142 XSIG140144 XSIG140155 XSIG140163 XSIG140171 XSIG140182 XSIG140183 XSIG140193 XSIG140197 XSIG140199 XSIG140204 XSIG140206 XSIG140217 XSIG140224 XSIG150003 XSIG150005 XSIG150008 XSIG150011 XSIG150013 XSIG150019 XSIG150039 XSIG150053 XSIG150054 XSIG150068 XSIG150069 XSIG150090 XSIG150091 XSIG150115 XSIG150123 XSIG150127 XSIG150131 XSIG150140 XSIG150141 XSIG150143 XSIG150153 XSIG150162 XSIG150166 XSIG150170 XSIG150171 XSIG150178 XSIG150180 XSIG150219 XSIG150227 XSIG150243 XSIG150244 XSIG150246 XSIG150275 XSIG160133 XSIG160141 XSIG160144 XSIG160146 XSIG160161 XSIG160169 XSIG160171 XSIG160172 XSIG160213 XSIG160220 XSIG160222 XSIG160224 XSIG160235 XSIG160247 XSIG160248 XSIG160249 XSIG160250 XSIG160271 XSIG160273 XSIG160278 XSIG160280 XSIG160287 XSIG160319 XSIG170051 XSIG170145 XSIG170193 XSIG170197 XSIG170199 XSIG170211 XSIG170226 XSIG170274 XSIG170278 XSIG170286 XSIG170290 XSIG170299 XSIG170305 XSIG170309 XSIG170322 XSIG170328 XSIG170338 XSIG170340 XSIG170348 XSIG170351 XSIG180229 XSIG180233 XSIG180235 XSIG180247 XSIG180264 XSIG180269 XSIG180270 XSIG180284 XSIG180299 XSIG180310 XSIG180315 XSIG180327 XSIG180338 XSIG180342 XSIG180358 XSIG180365 XSIG180366 XSIG180371 XSIG180378 XSIG180383 XSIG180387 XSIG180390 XSIG180393 XSIG180396 XSIG190051 XSIG190054 XSIG190107 XSIG190109 XSIG190111 XSIG190113 XSIG190116 XSIG190117 XSIG190202 XSIG190215 XSIG190216 XSIG190233 XSIG190235 XSIG190242 XSIG190247 XSIG190249 XSIG190261 XSIG190263 XSIG190270 XSIG190275 XSIG190277 XSIG190293 XSIG190299 XSIG190305 XSIG200001 XSIG200009 XSIG200010 XSIG200016 XSIG200131 XSIG200133 XSIG200136 XSIG200138 XSIG200168 XSIG200169 XSIG200172 XSIG200174 XSIG200397 XSIG200398 XSIG200405 XSIG200409 XSIG200411 XSIG200422 XSIG200423 XSIG200430 XSIG200434 XSIG200436 XSIG200447 XSIG200448 XSIG200455 XSIG200459 XSIG200461 XSIG200480 XSIG200487 XSIG200493 XSIG210102 XSIG210109 XSIG210110 XSIG210116 XSIG210137 XSIG210138 XSIG210196 XSIG210197 XSIG210205 XSIG210210 XSIG210212 XSIG210214 XSIG210283 XSIG210285 XSIG210288 XSIG210289 XSIG210302 XSIG210304 XSIG210306 XSIG210309 XSIG210310 XSIG210323 XSIG210327 XSIG210343 XSIG210348 XSIG210350 XSIG210358 XSIG210364 XSIG210367 XSIG220001 XSIG220004 XSIG220008 XSIG220010 XSIG220124 XSIG220126 XSIG220129 XSIG220131 XSIG220135 XSIG220163 XSIG220165 XSIG220179 XSIG220223 XSIG220225 XSIG220227 XSIG220231 XSIG220242 XSIG220243 XSIG220246 XSIG220250 XSIG220252 XSIG220263 XSIG220264 XSIG220267 XSIG220271 XSIG220273 XSIG220275 XSIG220292 XSIG220298 XSIG220299 XSIG220306 XSIG220314 XSIG220319 XSIG220324 XSIG220327 XSIG230007 XSIG230013 XSIG230019 XSIG230022 XSIG230076 XSIG230079 XSIG230081 XSIG230082 XSIG230109 XSIG230110 XSIG230129 XSIG230133 XSIG230140 XSIG230141 XSIG230157 XSIG230161 XSIG230165 XSIG230181 XSIG240012 XSIG240019 XSIG240025 XSIG240078 XSIG240082 XSIG240084 XSIG240085 XSIG240123 XSIG240128 XSIG240129 XSIG240145 XSIG240149 XSIG240153 XSIG240157 XSIG240176 XSIG240181 XSIG240182 XSIG240202 XSIG240204 XSIG250005 XSIG250006 XSIG250013 XSIG250025 XSIG250031 XSIG250037 XSIG250040 XSIG250050 XSIG250060 XSIG250068 XSIG250073 XSIG250119 XSIG250120 XSIG250129 XSIG250132 XSIG250134 XSIG250135 XSIG250160 XSIG250174 XSIG250179 XSIG250180 XSIG250183 XSIG250184 XSIG250187 XSIG250195 XSIG250212 XSIG250231 XSIG260008 XSIG260009 XSIG260017 XSIG260018 XSIG260021 XSIG260022 XSIG260030 XSIG260031 XSIG260034 XSIG260035 XSIG260045 XSIG260048 XSIG260050 XSIG260053 XSIG260054 XSIG260056 XSIG260059 XSIG260064 XSIG260066 XSIG260067 XSIG260074 XSIG260076 XSIG260078 XSIG260080 XSIG260092 XSIG260095 XSIG260101 XSIG260102 XSIG260128 XSIG260134 XSIG260145 XSIG260146 XSIG260148 XSIG260164 XSIG260167 XSIG260172 XSIG260175 XSIG260186 XSIG260189 XSIG260206 XSIG260209 XSIG260227 XSIG260230 XSIG260232 XSIG270001 XSIG270002 XSIG270006 XSIG270013 XSIG270014 XSIG270015 XSIG270019 XSIG270026 XSIG270027 XSIG270028 XSIG270032 XSIG270039 XSIG270040 XSIG270041 XSIG270045 XSIG270052 XSIG270053 XSIG270054 XSIG270058 XSIG270065 XSIG270066 XSIG270067 XSIG270071 XSIG270078 XSIG270079 XSIG270080 XSIG270084 XSIG270091 XSIG270092 XSIG270094 XSIG270095 XSIG270097 XSIG270099 XSIG270101 XSIG270103 XSIG270105 XSIG270106 XSIG270108 XSIG270113 XSIG270115 XSIG270120 XSIG270133 XSIG270136 XSIG270148 XSIG270149 XSIG270152 XSIG270159 XSIG270160 XSIG270173 XSIG270177 XSIG280002 XSIG280009 XSIG280025 XSIG280028 XSIG280035 XSIG280036 XSIG280039 XSIG280043 XSIG280046 XSIG280048 XSIG280058 XSIG280062 XSIG280063 XSIG280068 XSIG280072 XSIG280073 XSIG280075 XSIG280079 XSIG280081 XSIG280082 XSIG280085 XSIG280087 XSIG280091 XSIG280093 XSIG280105 XSIG290001 XSIG290003 XSIG290005 XSIG290007 XSIG290009 XSIG290011 XSIG290026 XSIG290037 XSIG290038 XSIG290039 XSIG290040 XSIG290046 XSIG290047 XSIG290060 XSIG290061 XSIG290065 XSIG290078 XSIG290081 XSIG290086 XSIG290090 XSIG290091 XSIG290095 XSIG290100 XSIG290101 XSIG290105 XSIG290110 XSIG290111 XSIG290156 XSIG290160 XSIG290170 XSIG290175 XSIG290176 XSIG300001 XSIG300002 XSIG300003 XSIG300004 XSIG300005 XSIG300006 XSIG300016 XSIG300037 XSIG300042 XSIG300044 XSIG300046 XSIG300048 XSIG300050 XSIG300052 XSIG300066 XSIG300071 XSIG300078 XSIG300089 XSIG300090 XSIG300092 XSIG300094 XSIG300096 XSIG300098 XSIG300100 XSIG300116 XSIG300127 XSIG300129 XSIG300131 XSIG300133 XSIG300135 XSIG300151 XSIG300161 XSIG300162 XSIG300173 XSIG300174 XSIG300180 XSIG300238 XSIG300241 XSIG300256 XSIG300259 XSIG300269 XSIG300270 XSIG300271 XSIG300285 XSIG310012 XSIG310014 XSIG310019 XSIG310021 XSIG310023 XSIG310024 XSIG310025 XSIG310026 XSIG310029 XSIG310039 XSIG310041 XSIG310046 XSIG310049 XSIG310052 XSIG310053 XSIG310054 XSIG310055 XSIG310057 XSIG310070 XSIG310072 XSIG310077 XSIG310079 XSIG310082 XSIG310083 XSIG310084 XSIG310086 XSIG310088 XSIG310089 XSIG310091 XSIG310104 XSIG310105 XSIG310112 XSIG310116 XSIG310120 XSIG310121 XSIG310123 XSIG310124 XSIG310126 XSIG310128 XSIG310129 XSIG310130 XSIG310132 XSIG310134 XSIG310135 XSIG310142 XSIG310150 XSIG310151 XSIG310153 XSIG310154 XSIG310158 XSIG310159 XSIG310161 XSIG310165 XSIG310169 XSIG310171 XSIG310174 XSIG310189 XSIG310192 XSIG310198 XSIG310205 XSIG310208 XSIG310215 XSIG320004 XSIG320010 XSIG320016 XSIG320022 XSIG320027 XSIG320033 XSIG320041 XSIG320047 XSIG320054 XSIG320061 XSIG320067 XSIG320074 XSIG320080 XSIG320087 XSIG320093 XSIG320099 XSIG320106 XSIG320112 XSIG320119 XSIG320125 XSIG320131 XSIG320137 XSIG320142 XSIG320148 XSIG320159 XSIG320162 XSIG320166 XSIG320173 XSIG330005 XSIG330007 XSIG330012 XSIG330022 XSIG330038 XSIG330047 XSIG330060 XSIG330062 XSIG330065 XSIG330079 XSIG330080 XSIG330084 XSIG330095 XSIG330108 XSIG330110 XSIG330114 XSIG330126 XSIG330128 XSIG330132 XSIG330134 XSIG330156 XSIG330186 XSIG330208 XSIG330221 XSIG330237 XSIG340015 XSIG340025 XSIG340028 XSIG340037 XSIG340050 XSIG340061 XSIG340075 XSIG340081 XSIG340096 XSIG340098 XSIG340101 XSIG340110 XSIG340112 XSIG340124 XSIG340127 XSIG340148 XSIG340151 XSIG340162 XSIG340175 XSIG340187 XSIG350013 XSIG350025 XSIG350028 XSIG350038 XSIG350041 XSIG350054 XSIG350057 XSIG350067 XSIG350080 XSIG350089 XSIG350091 XSIG350103 XSIG350105 XSIG350117 XSIG350119 XSIG350131 XSIG350146 XSIG350157 XSIG350171 XSIG350183 XSIG360136 XSIG360138 XSIG360139 XSIG360140 XSIG360142 XSIG360149 XSIG360151 XSIG360156 XSIG360166 XSIG360167 XSIG360168 XSIG360174 XSIG360175 XSIG360176 XSIG360181 XSIG360183 XSIG360188
net class w15: PROTECTA PROTECTB PROTECTC
net class w20: +5V -5V GND VCC15+ VCC15-

## Components (designator, comment, footprint, x,y, rotation, side; value= is the part's Value field where it differs from the comment)
C1 "08070043" SC0805 720,7180 r90 bottom
C3 "08070589" sc0603 5160,2570 r90 top
C4 "08070589" sc0603 5380,2570 r90 bottom
C5 "08070589" sc0603 5470,2570 r90 bottom
C6 "08070589" sc0603 5380,2570 r90 top
C7 "08070589" sc0603 5670,2570 r90 top
C8 "08070589" sc0603 5530,2570 r90 top
C11 "08070589" sc0603 6160,2570 r270 bottom
C13 "08070589" sc0603 6300,2570 r270 top
C14 "08070589" sc0603 6150,2570 r270 top
C17 "08070727" SC0805 5750,930 r180 top
C18 "08070727" SC0805 6710,2350 r0 top
C19 "08070727" SC0805 6710,2520 r0 top
C20 "08070418" SC0805 6280,1580 r0 bottom
C21 "08070418" SC0805 6280,1470 r0 bottom
C22 "08070504" sc0603 6400,1160 r270 bottom
C23 "08070504" sc0603 6100,1320 r180 bottom
C24 "08070504" sc0603 6710,1660 r0 bottom
C25 "08070504" sc0603 6580,1790 r90 bottom
C27 "08070504" sc0603 4710,1270 r0 bottom
C28 "08070504" sc0603 4540,1130 r270 bottom
C29 "08070504" sc0603 4210,1800 r90 bottom
C30 "08070504" sc0603 6710,1570 r0 bottom
C31 "08070504" sc0603 6710,1430 r0 bottom
C32 "08070504" sc0603 6490,1160 r270 bottom
C33 "08070504" sc0603 6300,1160 r270 bottom
C34 "08070504" sc0603 6100,1400 r0 bottom
C35 "08070504" sc0603 6440,1800 r90 bottom
C36 "08070504" sc0603 4710,1400 r0 bottom
C37 "08070504" sc0603 4270,1800 r90 bottom
C38 "08070727" SC0805 5750,1080 r180 top
C219 "08070595" sc0603 4910,2570 r90 bottom
C220 "08070504" sc0603 6710,1360 r0 bottom
C224 "08070504" sc0603 630,4560 r270 top
C225 "08070504" sc0603 4050,1450 r180 bottom
C226 "08070504" sc0603 8500,1120 r0 bottom
C227 "08070504" sc0603 7990,1470 r180 bottom
C228 "08070504" sc0603 8630,840 r270 bottom
C229 "08070504" sc0603 8510,1350 r90 bottom
C230 "08070504" sc0603 8780,1500 r90 bottom
C231 "08070504" sc0603 8280,1060 r180 bottom
C232 "08070504" sc0603 8570,1350 r90 bottom
C238 "08070504" sc0603 7990,1010 r180 bottom
C239 "08070504" sc0603 2430,1250 r0 bottom
C241 "08070247" sc0603 700,5070 r270 top
C242 "08070504" sc0603 610,4410 r90 top
C243 "08070504" sc0603 2700,660 r270 bottom
C244 "08070504" sc0603 2320,1310 r90 bottom
C245 "08070504" sc0603 2410,1400 r180 bottom
C246 "08070504" sc0603 3990,750 r270 top
C248 "08070504" sc0603 4370,1130 r270 bottom
C249 "08070504" sc0603 4050,1540 r180 bottom
C250 "08070504" sc0603 2500,1400 r270 bottom
C253 "08070504" sc0603 4460,1130 r270 bottom
C255 "08070504" sc0603 4050,1360 r180 bottom
C256 "08070504" sc0603 8310,1240 r0 bottom
C257 "08070504" sc0603 8280,1120 r180 bottom
C259 "08070504" sc0603 8390,1330 r270 bottom
C260 "08070504" sc0603 8650,1650 r90 bottom
C261 "08070504" sc0603 8110,1620 r180 bottom
C262 "08070504" sc0603 8430,1240 r0 bottom
C263 "08070504" sc0603 8390,1140 r90 bottom
C264 "08070504" sc0603 8800,1010 r0 bottom
C265 "08070504" sc0603 8140,840 r270 bottom
C266 "08070504" sc0603 2240,1400 r0 bottom
C267 "08070504" sc0603 4250,1130 r270 bottom
C268 "08070504" sc0603 2560,990 r270 bottom
C269 "08070504" sc0603 2090,990 r270 bottom
C270 "08070504" sc0603 2320,1490 r90 bottom
C271 "08070504" sc0603 2260,1620 r90 bottom
C272 "08070504" sc0603 2210,1260 r180 bottom
C273 "08070504" sc0603 2320,1620 r90 bottom
C274 "08070504" sc0603 2100,1810 r90 bottom
C275 "08070504" sc0603 8500,1060 r0 bottom
C279 "08070504" sc0603 2210,1320 r0 bottom
C280 "08070504" sc0603 2430,1310 r0 bottom
C281 "08070504" sc0603 8280,1320 r0 bottom
C282 "08070504" sc0603 500,2440 r90 top
C284 "08070504" sc0603 2720,1170 r0 bottom
C285 "08070504" sc0603 1920,1150 r180 bottom
C286 "08070504" sc0603 2590,1790 r90 bottom
C287 "08070504" sc0603 1960,1680 r90 bottom
C289 "08070504" sc0603 8020,3300 r270 top
C290 "08070504" sc0603 570,6280 r90 top
C291 "08070504" sc0603 8590,1240 r0 bottom
C292 "08070504" sc0603 7210,2380 r90 top
C293 "08070504" sc0603 2720,1630 r0 bottom
C295 "08070504" sc0603 8590,1180 r0 bottom
C297 "08070504" sc0603 5630,1720 r90 bottom
C298 "08070504" sc0603 9240,450 r270 bottom
C299 "08070504" sc0603 2450,330 r90 top
C300 "08070504" sc0603 7270,3030 r180 top
C301 "08070504" sc0603 7270,3090 r180 top
C303 "08070504" sc0603 6150,530 r90 top
C304 "08070504" sc0603 4800,3790 r90 top
C305 "08070504" sc0603 3130,3760 r90 top
C306 "08070504" sc0603 2430,1520 r90 bottom
C307 "08070504" sc0603 2500,1520 r90 bottom
C308 "08070504" sc0603 9770,380 r180 bottom
C309 "08070504" sc0603 10330,1680 r270 bottom
C310 "08070504" sc0603 7720,2770 r270 top
C311 "08070504" sc0603 7565,2770 r270 top
C312 "08070504" sc0603 5270,790 r270 bottom
C313 "08070595" sc0603 3760,2570 r90 bottom
C314 "08070595" sc0603 3700,2570 r90 top
C315 "08070595" sc0603 3910,2570 r90 top
C316 "08070595" sc0603 4060,2570 r90 top
C317 "08070595" sc0603 4000,2570 r90 bottom
C318 "08070595" sc0603 4220,2570 r90 top
C319 "08070595" sc0603 4160,2570 r90 bottom
C320 "08070595" sc0603 4610,2570 r270 top
C321 "08070595" sc0603 4460,2570 r270 bottom
C322 "08070595" sc0603 4520,2570 r270 top
C323 "08070595" sc0603 4300,2570 r270 top
C324 "08070595" sc0603 4830,2570 r270 bottom
C325 "08070592" sc0603 5490,750 r270 bottom
C326 "08070595" sc0603 4830,2570 r270 top
C327 "08070595" sc0603 4910,2570 r270 top
C328 "08070595" sc0603 4670,2570 r270 bottom
C329 "08070592" sc0603 5700,750 r270 bottom
C330 "08070727" SC0805 5160,1190 r270 top
C331 "08070727" SC0805 5010,1190 r270 top
C332 "08070727" SC0805 5170,1500 r90 top
C333 "08070727" SC0805 5020,1500 r90 top
C334 "08070727" SC0805 440,1150 r90 top
C335 "08070727" SC0805 7440,2630 r0 top
C336 "08070727" SC0805 5030,1780 r270 top
C337 "08070727" SC0805 5180,1780 r270 top
C338 "08070727" SC0805 7420,2960 r270 top
C339 "08070418" SC0805 4500,1800 r90 bottom
C340 "08070418" SC0805 4410,1800 r90 bottom
C341 "08070230" sc0603 8880,2440 r270 bottom
C342 "08070230" sc0603 8990,2440 r270 bottom
C343 "08070230" sc0603 8820,1840 r90 top
C344 "08070230" sc0603 8720,2230 r90 top
C345 "08070230" sc0603 2940,2590 r270 top
C346 "08070230" sc0603 2940,2470 r270 top
C347 "08070230" sc0603 2940,2210 r90 top
C348 "08070230" sc0603 2940,2340 r270 top
C349 "08070230" sc0603 8180,5990 r90 bottom
C350 "08070230" sc0603 8810,7260 r180 top
C351 "08070230" sc0603 7600,2160 r270 top
C352 "08070230" sc0603 7760,2170 r270 top
C353 "08070230" sc0603 415,1210 r90 bottom
C354 "08070230" sc0603 430,995 r270 bottom
C355 "08070230" sc0603 3620,6260 r90 top
C356 "08070230" sc0603 3210,6280 r180 top
C357 "08070230" sc0603 2390,6250 r90 top
C358 "08070230" sc0603 770,900 r0 bottom
C359 "08070230" sc0603 7300,2150 r270 top
C360 "08070230" sc0603 210,1440 r90 bottom
C361 "08070582" sc0603 5500,6260 r90 top
C362 "08070230" sc0603 3260,7740 r270 bottom
C363 "08070230" sc0603 2710,7740 r270 top
C364 "08070230" sc0603 2910,7230 r270 top
C365 "08070499" sc0603 1710,6420 r270 top
C366 "08070499" sc0603 1710,6920 r270 top
C367 "08070499" sc0603 1805,7430 r90 bottom
C368 "08070230" sc0603 3010,7740 r270 bottom
C369 "08070230" sc0603 2610,7420 r90 top
C370 "08070230" sc0603 2710,7230 r270 top
C371 "08070499" sc0603 2120,6410 r270 top
C372 "08070499" sc0603 2140,6920 r90 top
C373 "08070499" sc0603 2140,7430 r270 top
C374 "08070230" sc0603 8030,2225 r270 bottom
C375 "08070230" sc0603 7830,6920 r270 bottom
C376 "08070230" sc0603 7920,6270 r90 top
C377 "08070230" sc0603 920,430 r270 top
C384 "08070583" sc0603 4990,6400 r270 bottom
C402 "08070230" sc0603 8350,6230 r180 top
C403 "08070230" sc0603 8785,7070 r180 bottom
C404 "08070230" sc0603 9840,7190 r270 top
C405 "08070230" sc0603 9390,7190 r270 top
C406 "08070230" sc0603 10280,7190 r270 bottom
C407 "08070230" sc0603 9840,7190 r270 bottom
C408 "08070230" sc0603 10060,7190 r270 top
C409 "08070230" sc0603 10280,7190 r270 top
C410 "08070230" sc0603 9620,7190 r270 top
C411 "08070230" sc0603 10060,7190 r270 bottom
C413 "08070230" sc0603 9610,7330 r90 bottom
C414 "08070230" sc0603 8510,2630 r0 top
C415 "08070230" sc0603 7840,410 r90 bottom
C416 "08070230" sc0603 980,7030 r90 top
C417 "08070230" sc0603 1140,7390 r90 top
C418 "08070230" sc0603 1620,7210 r270 bottom
C419 "08070230" sc0603 990,6830 r270 bottom
C420 "08070230" sc0603 1360,7210 r90 bottom
C421 "08070230" sc0603 1440,6640 r90 bottom
C422 "08070230" sc0603 3600,5350 r90 bottom
C423 "08070230" sc0603 440,2340 r90 bottom
C424 "08070230" sc0603 590,5970 r270 top
C425 "08070230" sc0603 410,5780 r90 top
C426 "08070230" sc0603 170,5780 r90 top
C427 "08070582" sc0603 5390,7430 r90 top
C428 "08070582" sc0603 5390,6930 r270 top
C429 "08070230" sc0603 10510,770 r270 top
C430 "08070230" sc0603 790,7020 r90 bottom
C431 "08070230" sc0603 390,3300 r0 bottom
C432 "08070230" sc0603 390,3060 r0 bottom
C433 "08070230" sc0603 530,6330 r270 bottom
C434 "08070230" sc0603 410,6600 r90 top
C435 "08070230" sc0603 140,6330 r270 bottom
C436 "08070230" sc0603 7900,4700 r270 bottom
C438 "08070230" sc0603 10440,770 r270 top
C439 "08070230" sc0603 300,3210 r270 bottom
C440 "08070230" sc0603 7450,2150 r270 top
C441 "08070230" sc0603 300,1440 r90 bottom
C445 "08070247" sc0603 8670,2850 r180 top
C446 "08070247" sc0603 8970,2850 r180 top
C447 "08070247" sc0603 9270,2950 r180 top
C448 "08070247" sc0603 9570,2950 r180 top
C449 "08070247" sc0603 9120,2850 r180 top
C450 "08070247" sc0603 8820,2850 r180 top
C451 "08070247" sc0603 1920,3160 r180 top
C452 "08070247" sc0603 2570,3160 r180 top
C453 "08070247" sc0603 2410,2390 r180 top
C454 "08070247" sc0603 2570,2390 r180 top
C455 "08070247" sc0603 2070,2390 r180 top
C456 "08070247" sc0603 1730,2390 r180 top
C469 "08070247" sc0603 8200,2950 r180 top
C470 "08070247" sc0603 10300,770 r270 top
C471 "08070247" sc0603 10230,770 r270 top
C478 "08070247" sc0603 8200,2850 r180 top
C479 "08070247" sc0603 8670,2950 r180 top
C480 "08070247" sc0603 8970,2950 r180 top
C481 "08070247" sc0603 9270,2850 r180 top
C482 "08070247" sc0603 9570,2850 r180 top
C483 "08070247" sc0603 9120,2950 r180 top
C484 "08070247" sc0603 8820,2950 r180 top
C485 "08070247" sc0603 1920,3060 r180 top
C486 "08070247" sc0603 2570,3060 r180 top
C487 "08070247" sc0603 2410,2290 r180 top
C488 "08070247" sc0603 2570,2290 r180 top
C489 "08070247" sc0603 2070,2290 r180 top
C490 "08070247" sc0603 1730,2290 r180 top
C498 "08070247" sc0603 5630,750 r90 bottom
C507 "08070249" sc0603 6980,1510 r180 bottom
C508 "08070249" sc0603 5230,690 r180 top
C509 "08070249" sc0603 5500,5870 r270 top
C510 "08070249" sc0603 4620,6270 r270 top
C511 "08070249" sc0603 4710,5260 r90 bottom
C512 "08070249" sc0603 2530,6410 r90 top
C513 "08070249" sc0603 7150,1350 r0 bottom
C514 "08070262" sc0603 5270,500 r180 bottom
C515 "08070249" sc0603 5230,480 r180 top
C516 "08070249" sc0603 7298.57,1277 r180 bottom
C517 "08070249" sc0603 280,1490 r0 top
C518 "08070249" sc0603 711.63,1954.11 r90 top
C520 "08070504" sc0603 5600,4740 r0 top
C521 "08070504" sc0603 5100,5330 r0 top
C522 "08070504" sc0603 4250,6250 r0 top
C523 "08070504" sc0603 3720,5980 r0 top
C524 "08070504" sc0603 3610,6720 r270 top
C525 "08070504" sc0603 3510,7080 r270 top
C526 "08070504" sc0603 3170,6720 r90 top
C527 "08070504" sc0603 3060,7080 r90 top
C528 "08070504" sc0603 2720,3190 r90 top
C529 "08070504" sc0603 6290,5750 r90 top
C530 "08070504" sc0603 6850,4180 r270 top
C531 "08070504" sc0603 6920,5750 r90 top
C535 "08070504" sc0603 8760,7740 r90 top
C536 "08070504" sc0603 5480,4320 r270 top
C537 "08070504" sc0603 4900,4910 r270 top
C538 "08070504" sc0603 4040,5970 r90 top
C539 "08070504" sc0603 8720,6190 r90 bottom
C540 "08070504" sc0603 7540,4900 r270 top
C541 "08070504" sc0603 7520,4480 r270 bottom
C542 "08070504" sc0603 3680,5680 r90 top
C543 "08070504" sc0603 7660,5750 r270 top
C544 "08070504" sc0603 7660,5910 r90 top
C545 "08070504" sc0603 4000,7090 r270 bottom
C546 "08070504" sc0603 3870,7670 r270 bottom
C547 "08070504" sc0603 6590,5750 r90 top
C548 "08070504" sc0603 5970,5520 r270 bottom
C549 "08070504" sc0603 7130,4480 r270 top
C553 "08070504" sc0603 3770,5680 r270 top
C554 "08070504" sc0603 3710,6720 r90 top
C555 "08070504" sc0603 3270,6720 r270 top
C556 "08070504" sc0603 2460,6410 r90 top
C557 "08070504" sc0603 1710,7080 r270 top
C558 "08070504" sc0603 2450,6920 r90 top
C559 "08070504" sc0603 2140,7080 r270 top
C560 "08070504" sc0603 2870,6270 r270 top
C561 "08070504" sc0603 2610,6570 r270 top
C566 "08070504" sc0603 7010,6260 r270 top
C568 "08070504" sc0603 5620,6260 r270 top
C571 "08070504" sc0603 3100,5130 r90 top
C572 "08070504" sc0603 7800,5247 r270 top
C573 "08070504" sc0603 5180,2910 r90 top
C574 "08070504" sc0603 9110,5110 r90 top
C576 "08070504" sc0603 6020,7240 r270 top
C578 "08070504" sc0603 4250,5260 r270 top
C583 "08070504" sc0603 2460,5130 r90 top
C584 "08070504" sc0603 5800,6260 r90 top
C585 "08070504" sc0603 5980,5840 r270 top
C590 "08070504" sc0603 9660,4310 r270 top
C604 "08070504" sc0603 8240,6120 r270 top
C605 "08070504" sc0603 5030,4910 r270 top
C606 "08070504" sc0603 1710,6580 r270 top
C607 "08070504" sc0603 7340,6260 r270 top
C608 "08070504" sc0603 7200,5750 r90 top
C609 "08070504" sc0603 7370,5240 r270 top
C610 "08070504" sc0603 5640,4320 r270 top
C611 "08070504" sc0603 5390,4620 r270 top
C612 "08070504" sc0603 6670,6260 r270 top
C613 "08070504" sc0603 4520,5680 r90 top
C614 "08070504" sc0603 4300,5810 r270 top
C615 "08070504" sc0603 4040,6120 r270 top
C617 "08070504" sc0603 7710,4350 r180 top
C618 "08070504" sc0603 4910,5280 r90 top
C619 "08070504" sc0603 4620,3290 r270 top
C620 "08070504" sc0603 6870,3290 r270 top
C621 "08070504" sc0603 6420,2910 r90 top
C622 "08070504" sc0603 6370,6770 r270 top
C623 "08070504" sc0603 6510,7740 r90 top
C624 "08070504" sc0603 6010,3790 r90 top
C625 "08070504" sc0603 6570,3800 r90 top
C626 "08070504" sc0603 6310,3290 r90 top
C627 "08070504" sc0603 5800,3290 r270 top
C629 "08070504" sc0603 5750,3100 r90 top
C630 "08070504" sc0603 4160,2910 r90 top
C631 "08070504" sc0603 3570,3080 r270 bottom
C632 "08070504" sc0603 7560,5750 r90 top
C633 "08070504" sc0603 3430,3450 r90 bottom
C634 "08070504" sc0603 7160,6770 r90 top
C635 "08070504" sc0603 5750,2910 r90 top
C636 "08070504" sc0603 5130,3290 r270 top
C637 "08070504" sc0603 6020,6770 r270 top
C639 "08070504" sc0603 5820,7740 r90 top
C640 "08070504" sc0603 6440,7080 r270 top
C641 "08070504" sc0603 4070,3280 r270 top
C642 "08070504" sc0603 3820,3090 r90 top
C643 "08070504" sc0603 9110,4490 r90 top
C644 "08070504" sc0603 4240,3770 r90 top
C645 "08070504" sc0603 3820,2910 r90 top
C646 "08070504" sc0603 7250,3720 r0 top
C647 "08070504" sc0603 5480,3800 r90 top
C648 "08070504" sc0603 6780,4530 r270 top
C649 "08070504" sc0603 3760,3800 r90 top
C651 "08070504" sc0603 5970,5390 r90 bottom
C654 "08070504" sc0603 6750,2910 r90 top
C656 "08070504" sc0603 7070,2910 r90 top
C657 "08070504" sc0603 6170,7740 r90 top
C658 "08070504" sc0603 6100,2910 r90 top
C659 "08070504" sc0603 6170,6770 r90 top
C660 "08070504" sc0603 8050,6380 r270 bottom
C661 "08070504" sc0603 6105.08,7080 r270 top
C662 "08070504" sc0603 8150,6910 r270 top
C663 "08070504" sc0603 8260,6560 r90 top
C664 "08070504" sc0603 7920,7740 r90 top
C665 "08070504" sc0603 8300,7270 r90 top
C666 "08070504" sc0603 7830,7070 r270 top
C667 "08070504" sc0603 8910,6770 r270 top
C668 "08070504" sc0603 8530,5960 r90 top
C669 "08070504" sc0603 9410,5340 r180 top
C671 "08070504" sc0603 7480,7080 r90 top
C672 "08070504" sc0603 8540,6800 r270 top
C674 "08070504" sc0603 8480,6380 r270 bottom
C675 "08070504" sc0603 6180,5750 r90 top
C676 "08070504" sc0603 7180,4750 r90 top
C677 "08070504" sc0603 7830,6560 r270 top
C678 "08070504" sc0603 5820,6770 r90 top
C679 "08070504" sc0603 10360,5110 r90 top
C681 "08070504" sc0603 6670,5240 r270 top
C692 "08070504" sc0603 5190,6260 r270 top
C695 "08070504" sc0603 4910,6560 r270 top
C704 "08070504" sc0603 7670,6270 r270 top
C707 "08070504" sc0603 7470,6550 r270 top
C727 "08070018" SC0805 4970,7550 r180 bottom
C728 "08070504" sc0603 2990,2870 r90 top
C730 "08070018" SC0805 4330,7640 r0 bottom
C731 "08070504" sc0603 5710,7430 r90 top
C733 "08070504" sc0603 2010,7430 r90 top
C734 "08070504" sc0603 5390,7580 r270 top
C735 "08070504" sc0603 3370,6410 r90 top
C736 "08070504" sc0603 4070,7220 r90 top
C737 "08070504" sc0603 2910,7420 r90 top
C738 "08070504" sc0603 8340,7740 r90 top
C740 "08070504" sc0603 3070,7580 r270 top
C741 "08070504" sc0603 2010,6920 r90 top
C743 "08070504" sc0603 6420,3100 r90 top
C744 "08070504" sc0603 2610,7580 r270 top
C745 "08070504" sc0603 5800,7080 r270 top
C746 "08070504" sc0603 7700,7300 r270 top
C747 "08070504" sc0603 3590,5680 r90 top
C748 "08070504" sc0603 8570,7425 r90 top
C750 "08070504" sc0603 6680,7240 r270 top
C759 "08070595" sc0603 4370,2570 r90 bottom
C761 "08070346" SC1210 8240,5590 r270 top
C762 "08070346" SC1210 8680,6570 r90 top
C763 "08070346" SC1210 5550,5120 r180 top
C764 "08070346" SC1210 5030,5780 r90 top
C765 "08070346" SC1210 4300,6510 r90 top
C766 "08070346" SC1210 8250,5380 r90 top
C767 "08070346" SC1210 8820,6570 r90 top
C768 "08070346" SC1210 5550,4980 r180 top
C769 "08070346" SC1210 5030,5530 r270 top
C770 "08070346" SC1210 4130,6510 r90 top
C771 "08070346" SC1210 7270,2860 r270 top
C772 "08070401" SC0805 2300,270 r0 bottom
C773 "08070401" SC0805 2100,410 r180 bottom
C778 "08010467" SC2-250-303 4320,7640 r90 top
C783 "08070471" SC0805 2530,6240 r270 top
C784 "08070471" SC0805 8350,7380 r270 bottom
C785 "08070471" SC0805 8250,6910 r270 bottom
C786 "08070471" SC0805 8360,6370 r270 bottom
C787 "08070471" SC0805 7928.5,7440 r270 bottom
C788 "08070228" sc0603 6910,4900 r270 top
C789 "08070228" sc0603 6940,6050 r90 top
C790 "08070228" sc0603 5980,5070 r270 top
C791 "08070228" sc0603 5840,5840 r90 bottom
C792 "08070228" sc0603 7270,4900 r270 top
C793 "08070228" sc0603 7180,4610 r90 bottom
C794 "08070228" sc0603 6290,6050 r90 top
C795 "08070228" sc0603 6190,4930 r270 top
C796 "08070228" sc0603 6540,4360 r270 top
C797 "08070228" sc0603 6660,4540 r270 top
C798 "08070471" SC0805 8350,5800 r270 top
C799 "08070471" SC0805 8785,6925 r180 bottom
C800 "08070008" SC0805 8760,6400 r90 top
C801 "08070008" SC0805 8420,6190 r90 bottom
C802 "08070228" sc0603 6550,4900 r270 top
C803 "08070228" sc0603 6470,6050 r90 top
C806 "08070403" SC0805 5400,5490 r90 top
C807 "08070403" SC0805 4780,5770 r90 bottom
C808 "08070403" SC0805 4610,4450 r90 top
C809 "08070403" SC0805 5620,6060 r90 top
C810 "08070403" SC0805 4590,5780 r90 bottom
C811 "08070403" SC0805 4670,5070 r90 top
C812 "08070612" SC0805 7390,5750 r270 top
C816 "08070372" SC0805 940,7550 r270 top
C817 "08070372" SC0805 8360,2470 r0 bottom
C818 "08070372" SC0805 7530,330 r270 bottom
C819 "08070372" SC0805 1620,7730 r90 bottom
C820 "08070372" SC0805 1360,7020 r90 bottom
C821 "08070372" SC0805 1200,7730 r90 bottom
C822 "08070372" SC0805 1580,6830 r90 bottom
C823 "08070372" SC0805 1040,7550 r270 top
C824 "08070372" SC0805 940,7390 r90 top
C825 "08070372" SC0805 790,7550 r270 top
C826 "08070026" SC1210 3740,6090 r180 top
C827 "08070026" SC1210 3660,7080 r180 top
C828 "08070026" SC1210 3220,7080 r0 top
C829 "08070043" SC0805 4230,4510 r90 top
C830 "08070043" SC0805 3620,4510 r90 top
C832 "08070247" sc0603 8520,2850 r180 top
C833 "08070247" sc0603 8520,2950 r180 top
C834 "08070247" sc0603 9420,2950 r180 top
C835 "08070247" sc0603 9420,2850 r180 top
C836 "08070247" sc0603 10020,2850 r180 top
C837 "08070247" sc0603 10020,2950 r180 top
C838 "08070247" sc0603 10170,2950 r180 top
C839 "08070247" sc0603 10170,2850 r180 top
C840 "08070247" sc0603 9870,2850 r180 top
C841 "08070247" sc0603 9870,2950 r180 top
C842 "08070247" sc0603 9720,2850 r180 top
C843 "08070247" sc0603 9720,2950 r180 top
C844 "08070247" sc0603 10320,2950 r180 top
C845 "08070247" sc0603 10320,2850 r180 top
C846 "08070247" sc0603 10470,2850 r180 top
C847 "08070247" sc0603 10470,2950 r180 top
C848 "08070247" sc0603 2240,3170 r180 top
C849 "08070247" sc0603 2240,3070 r180 top
C850 "08070247" sc0603 2240,2390 r180 top
C851 "08070247" sc0603 2240,2290 r180 top
C852 "08070247" sc0603 1900,2390 r180 top
C853 "08070247" sc0603 1900,2290 r180 top
C854 "08070247" sc0603 1560,2390 r180 top
C855 "08070247" sc0603 1560,2290 r180 top
C856 "08070247" sc0603 1610,3180 r0 top
C857 "08070247" sc0603 1610,3080 r0 top
C858 "08070247" sc0603 1390,2390 r180 top
C859 "08070247" sc0603 1390,2290 r180 top
C876 "08070504" sc0603 3100,4340 r90 top
C877 "08070504" sc0603 4670,5250 r270 top
C880 "08070504" sc0603 8930,7440 r90 top
C881 "08070504" sc0603 8700,7740 r90 top
C882 "08070504" sc0603 9260,4650 r270 top
C883 "08070504" sc0603 7790,3830 r270 top
C885 "08070504" sc0603 7120,4100 r270 top
C886 "08070504" sc0603 6370,6260 r270 top
C896 "08070504" sc0603 1150,620 r270 top
C897 "08070504" sc0603 8730,170 r0 top
C907 "08070727" SC0805 3150,2870 r90 top
C911 "08010467" SC2-250-303 6020,4310 r90 top
C912 "08010467" SC2-250-303 4940,4180 r90 top
C916 "08010467" SC2-250-303 10320,1670 r0 top
C917 "08020059" STC3528 3820,5040 r270 top
C918 "08020059" STC3528 9810,6450 r270 top
C919 "08010466" SC2-250-228 3130,3210 r90 top
C928 "08070504" sc0603 7490,7720 r90 top
C929 "08070504" sc0603 8140,7450 r90 top
C937 "08070504" sc0603 7030,6770 r270 top
C938 "08070504" sc0603 7030,7240 r270 top
C939 "08070504" sc0603 10390,5870 r90 top
C940 "08070504" sc0603 2010,6420 r90 top
C941 "08070504" sc0603 2120,6580 r270 top
C942 "08010467" SC2-250-303 340,6920 r0 top
C943 "08010467" SC2-250-303 10240,6460 r90 top
C944 "08010467" SC2-250-303 9540,6460 r270 top
C945 "08070504" sc0603 8730,4770 r90 top
C953 "08070612" SC0805 5760,6050 r90 bottom
C954 "08010467" SC2-250-303 8420,3480 r270 top
C955 "08020059" STC3528 9970,6450 r270 top
C956 "08020059" STC3528 3970,5050 r270 top
C965 "08070504" sc0603 7690,3720 r180 top
C966 "08070504" sc0603 8870,6000 r90 bottom
C967 "08070504" sc0603 3720,6260 r270 top
C968 "08070504" sc0603 5620,5320 r270 bottom
C969 "08070504" sc0603 6990,5260 r270 top
C970 "08070504" sc0603 4700,4540 r270 top
C971 "08070504" sc0603 6020,6260 r270 top
C972 "08070504" sc0603 6810,5750 r90 top
C973 "08070504" sc0603 6360,7240 r270 top
C974 "08070504" sc0603 2140,7580 r270 top
C975 "08070504" sc0603 3370,7415 r90 top
C976 "08070504" sc0603 3060,6570 r270 top
C977 "08070504" sc0603 7020,4320 r270 top
C978 "08070504" sc0603 3540,7580 r270 top
C979 "08070504" sc0603 2920,6920 r90 top
C980 "08070504" sc0603 4450,6560 r270 top
C981 "08070504" sc0603 6670,6770 r270 top
C982 "08070504" sc0603 7150,7730 r90 top
C983 "08070504" sc0603 5710,6930 r90 top
C984 "08070504" sc0603 4860,3100 r270 top
C985 "08070504" sc0603 7390,7240 r270 top
C986 "08070504" sc0603 6840,6770 r90 top
C987 "08070504" sc0603 4310,6910 r90 top
C988 "08070504" sc0603 3540,6580 r270 top
C989 "08070504" sc0603 3850,7440 r90 top
C990 "08070504" sc0603 6750,3100 r90 top
C991 "08070504" sc0603 7700,6770 r270 top
C992 "08070504" sc0603 1710,7590 r270 top
C993 "08070504" sc0603 8800,5410 r90 top
C994 "08070504" sc0603 9160,3720 r90 top
C995 "08070504" sc0603 2610,7080 r270 top
C996 "08070504" sc0603 2460,7420 r90 top
C997 "08070504" sc0603 5390,7080 r270 top
C998 "08070504" sc0603 9730,5100 r90 top
C999 "08070504" sc0603 6490,6770 r90 top
C1000 "08070504" sc0603 9590,5850 r270 bottom
C1001 "08070504" sc0603 6510,5750 r90 top
C1002 "08070504" sc0603 6320,5260 r270 top
C1003 "08070504" sc0603 6780,7080 r270 top
C1004 "08070504" sc0603 7810,2770 r270 top
C1005 "08070504" sc0603 5800,5660 r90 top
C1006 "08070504" sc0603 3770,5260 r270 top
C1007 "08070504" sc0603 10320,4310 r270 top
C1008 "08070504" sc0603 10370,3730 r90 top
C1009 "08070504" sc0603 5430,3100 r90 top
C1010 "08070504" sc0603 2160,3850 r90 top
C1011 "08070504" sc0603 7360,3840 r270 top
C1012 "08070504" sc0603 1810,5130 r90 top
C1013 "08070504" sc0603 9910,4810 r90 top
C1015 "08070504" sc0603 1720,4150 r270 top
C1016 "08070504" sc0603 4680,6270 r270 top
C1017 "08070504" sc0603 5230,6910 r90 top
C1018 "08070504" sc0603 7380,6770 r270 top
C1019 "08070504" sc0603 9070,4300 r270 top
C1020 "08070504" sc0603 9760,3720 r90 top
C1021 "08070504" sc0603 4500,2910 r90 top
C1022 "08070504" sc0603 4770,6910 r90 top
C1023 "08070504" sc0603 4040,5690 r90 top
C1024 "08070504" sc0603 7130,7080 r270 top
C1025 "08070504" sc0603 6830,7730 r90 top
C1026 "08070504" sc0603 5390,6610 r270 top
C1027 "08070504" sc0603 7430,4460 r90 top
C1028 "08070504" sc0603 580,1180 r180 bottom
C1029 "08070504" sc0603 7490,4610 r270 top
C1030 "08070504" sc0603 7500,3320 r270 top
C1031 "08070504" sc0603 690,7550 r270 top
C1032 "08070504" sc0603 4450,7080 r270 top
C1033 "08070504" sc0603 4910,7240 r90 top
C1034 "08070504" sc0603 4910,6100 r270 top
C1035 "08070504" sc0603 570,7730 r270 bottom
C1036 "08070504" sc0603 4160,3100 r270 top
C1037 "08070504" sc0603 6100,3100 r90 top
C1038 "08070504" sc0603 4480,5070 r90 top
C1039 "08070504" sc0603 4500,3100 r270 top
C1040 "08070504" sc0603 8610,6120 r270 top
C1041 "08070504" sc0603 5390,5710 r90 top
C1043 "08070230" sc0603 590,7390 r270 bottom
C1044 "08070499" sc0603 4450,7260 r90 top
C1045 "08070499" sc0603 5010,7240 r270 top
C1046 "08070499" sc0603 4975,6260 r270 top
C1047 "08070583" sc0603 4230,5660 r0 top
C1048 "08070583" sc0603 4640,6665 r0 top
C1049 "08070583" sc0603 5130,6670 r0 top
C1050 "08070247" sc0603 7590,4610 r270 bottom
C1051 "08070247" sc0603 7625,5490 r180 bottom
C1052 "08070247" sc0603 3960,7230 r270 top
C1053 "08070612" SC0805 7160,5230 r90 top
C1054 "08070583" sc0603 4450,6400 r90 bottom
C1055 "08070583" sc0603 4170,5260 r90 top
C1056 "08070583" sc0603 4040,5810 r90 top
C1057 "08070583" sc0603 4450,6560 r90 bottom
C1058 "08070583" sc0603 5040,6570 r90 bottom
C1059 "08070583" sc0603 4910,5950 r270 top
C1060 "08070583" sc0603 4980,6900 r270 bottom
C1061 "08070583" sc0603 4450,6910 r270 bottom
C1062 "08070589" sc0603 7570,6260 r270 top
C1063 "08070589" sc0603 7150,6260 r270 top
C1064 "08070589" sc0603 6840,6260 r270 top
C1065 "08070589" sc0603 6490,6260 r270 top
C1066 "08070589" sc0603 6170,6260 r270 top
C1067 "08070589" sc0603 6070,6560 r90 bottom
C1068 "08070589" sc0603 7680,6930 r270 bottom
C1069 "08070589" sc0603 7320,6940 r270 bottom
C1070 "08070589" sc0603 6970,6920 r270 bottom
C1071 "08070589" sc0603 6630,6920 r270 bottom
C1072 "08070589" sc0603 6310,6920 r270 bottom
C1073 "08070589" sc0603 5920,6930 r90 bottom
C1074 "08070595" sc0603 5160,2570 r90 bottom
C1075 "08070595" sc0603 6450,2570 r270 top
C1076 "08070595" sc0603 6450,2570 r270 bottom
C1077 "08070589" sc0603 5840,2570 r270 bottom
C1078 "08070589" sc0603 5990,2570 r270 top
C1079 "08070589" sc0603 5830,2570 r270 top
C1080 "08070504" sc0603 4860,2910 r90 top
C1081 "08070504" sc0603 5130,5830 r270 top
C1082 "08070504" sc0603 3110,2550 r90 top
C1083 "08070504" sc0603 8820,2440 r90 top
C1084 "08070230" sc0603 8360,2850 r180 top
C1085 "08070583" sc0603 5240,7080 r270 top
C1086 "08070583" sc0603 5100,6260 r90 top
C1087 "08070583" sc0603 4570,7270 r0 top
C1088 "08070583" sc0603 7710,7730 r270 bottom
C1089 "08070583" sc0603 7340,7730 r270 bottom
C1090 "08070583" sc0603 7040,7730 r270 bottom
C1091 "08070583" sc0603 6650,7740 r270 bottom
C1092 "08070583" sc0603 6330,7740 r270 bottom
C1093 "08070583" sc0603 5940,7740 r270 bottom
C1094 "08070583" sc0603 7580,7730 r270 bottom
C1095 "08070583" sc0603 7150,7730 r270 bottom
C1096 "08070583" sc0603 6920,7730 r270 bottom
C1097 "08070583" sc0603 6510,7740 r270 bottom
C1098 "08070583" sc0603 6270,7740 r270 bottom
C1099 "08070583" sc0603 5820,7740 r270 bottom
C1100 "08070504" sc0603 9840,1650 r0 bottom
C1101 "08070230" sc0603 980,7020 r90 bottom
C1103 "08070504" sc0603 10280,7580 r270 bottom
C1104 "08070504" sc0603 10060,7580 r270 bottom
C1105 "08070504" sc0603 10060,7570 r270 top
C1106 "08070504" sc0603 9620,7580 r270 top
C1107 "08070504" sc0603 10280,7570 r270 top
C1108 "08070504" sc0603 9390,7570 r270 top
C1109 "08070504" sc0603 9840,7550 r270 bottom
C1110 "08070504" sc0603 9840,7580 r270 top
C1111 "08010467" SC2-250-303 870,5930 r0 top
C1112 "08070504" sc0603 2470,4340 r90 top
C1113 "08070504" sc0603 7540,4100 r270 top
C1114 "08070504" sc0603 10030,5370 r90 top
C1115 "08070504" sc0603 8640,7270 r90 top
C1116 "08070230" sc0603 2410,2770 r180 bottom
C1117 "08070230" sc0603 1710,2765 r0 bottom
C1118 "08070230" sc0603 2120,2770 r180 bottom
C1119 "08070230" sc0603 1500,3490 r90 top
C1120 "08070230" sc0603 8970,7350 r90 bottom
C1121 "08070230" sc0603 1500,4600 r90 top
C1122 "08070230" sc0603 1720,4600 r90 top
C1123 "08070230" sc0603 3020,5640 r90 top
C1124 "08070230" sc0603 2370,4600 r90 top
C1125 "08070230" sc0603 2110,4600 r90 top
C1126 "08070230" sc0603 2680,5640 r90 top
C1127 "08070230" sc0603 3030,4600 r90 top
C1128 "08070230" sc0603 1710,5640 r90 top
C1129 "08070230" sc0603 1420,5640 r90 top
C1130 "08070230" sc0603 2770,4600 r90 top
C1131 "08070230" sc0603 2420,5640 r90 top
C1132 "08070230" sc0603 2040,5640 r90 top
C1133 "08070612" SC0805 7610,3840 r90 top
C1134 "08070612" SC0805 7180,3840 r90 top
C1135 "08070612" SC0805 7860,4150 r270 top
C1136 "08070612" SC0805 7430,4130 r270 top
C1137 "08070372" SC0805 1530,3980 r90 top
C1138 "08070372" SC0805 8820,7680 r90 bottom
C1139 "08070234" sc0603 2420,3200 r0 bottom
C1140 "08070234" sc0603 1950,3200 r0 bottom
C1141 "08070234" sc0603 2220,3200 r180 bottom
C1142 "08030310" CAP2-400-240-520-480 10068.15,510 r0 top
C1143 "08030310" CAP2-400-240-520-480 435,786.85 r270 top
C1144 "08010510" SC2-400-400 9640,370 r0 top
C1145 "08010510" SC2-400-400 9200,370 r0 top
C1146 "08010510" SC2-400-400 4980,7590 r270 top
C1147 "08010510" SC2-400-400 9830,1670 r90 top
C1148 "08070504" sc0603 3650,6240 r270 bottom
C1149 "08070504" sc0603 4820,3650 r270 bottom
C1150 "08070504" sc0603 2960,6180 r270 bottom
C1151 "08070504" sc0603 4240,3630 r270 bottom
C1152 "08070504" sc0603 4360,6030 r90 bottom
C1153 "08070504" sc0603 5220,3460 r270 bottom
C1154 "08070504" sc0603 5250,3650 r90 bottom
C1155 "08070504" sc0603 4570,3630 r270 bottom